# Altium PCB 175-00008 rev 1, PCB, M2 Focus Drive.PcbDoc (part 1 of 3)
Units mil, origin at the board's own origin, x right, y up, seen from the top; angles counter-clockwise.
Board outline 6885.96 x 6885.86 mil, 9 copper layers (Top Layer (*.GTL), Mid-Layer 1 (*.G1), +24V (*.GP1), GND (*.GP2), +5V (*.GP3), +12V (*.GP4), -12V (*.GP5), +3.3V (*.GP6), Bottom Layer (*.GBL)), stack 52.6 mil thick; 151 components, 161 nets, 896 pads, 368 vias.
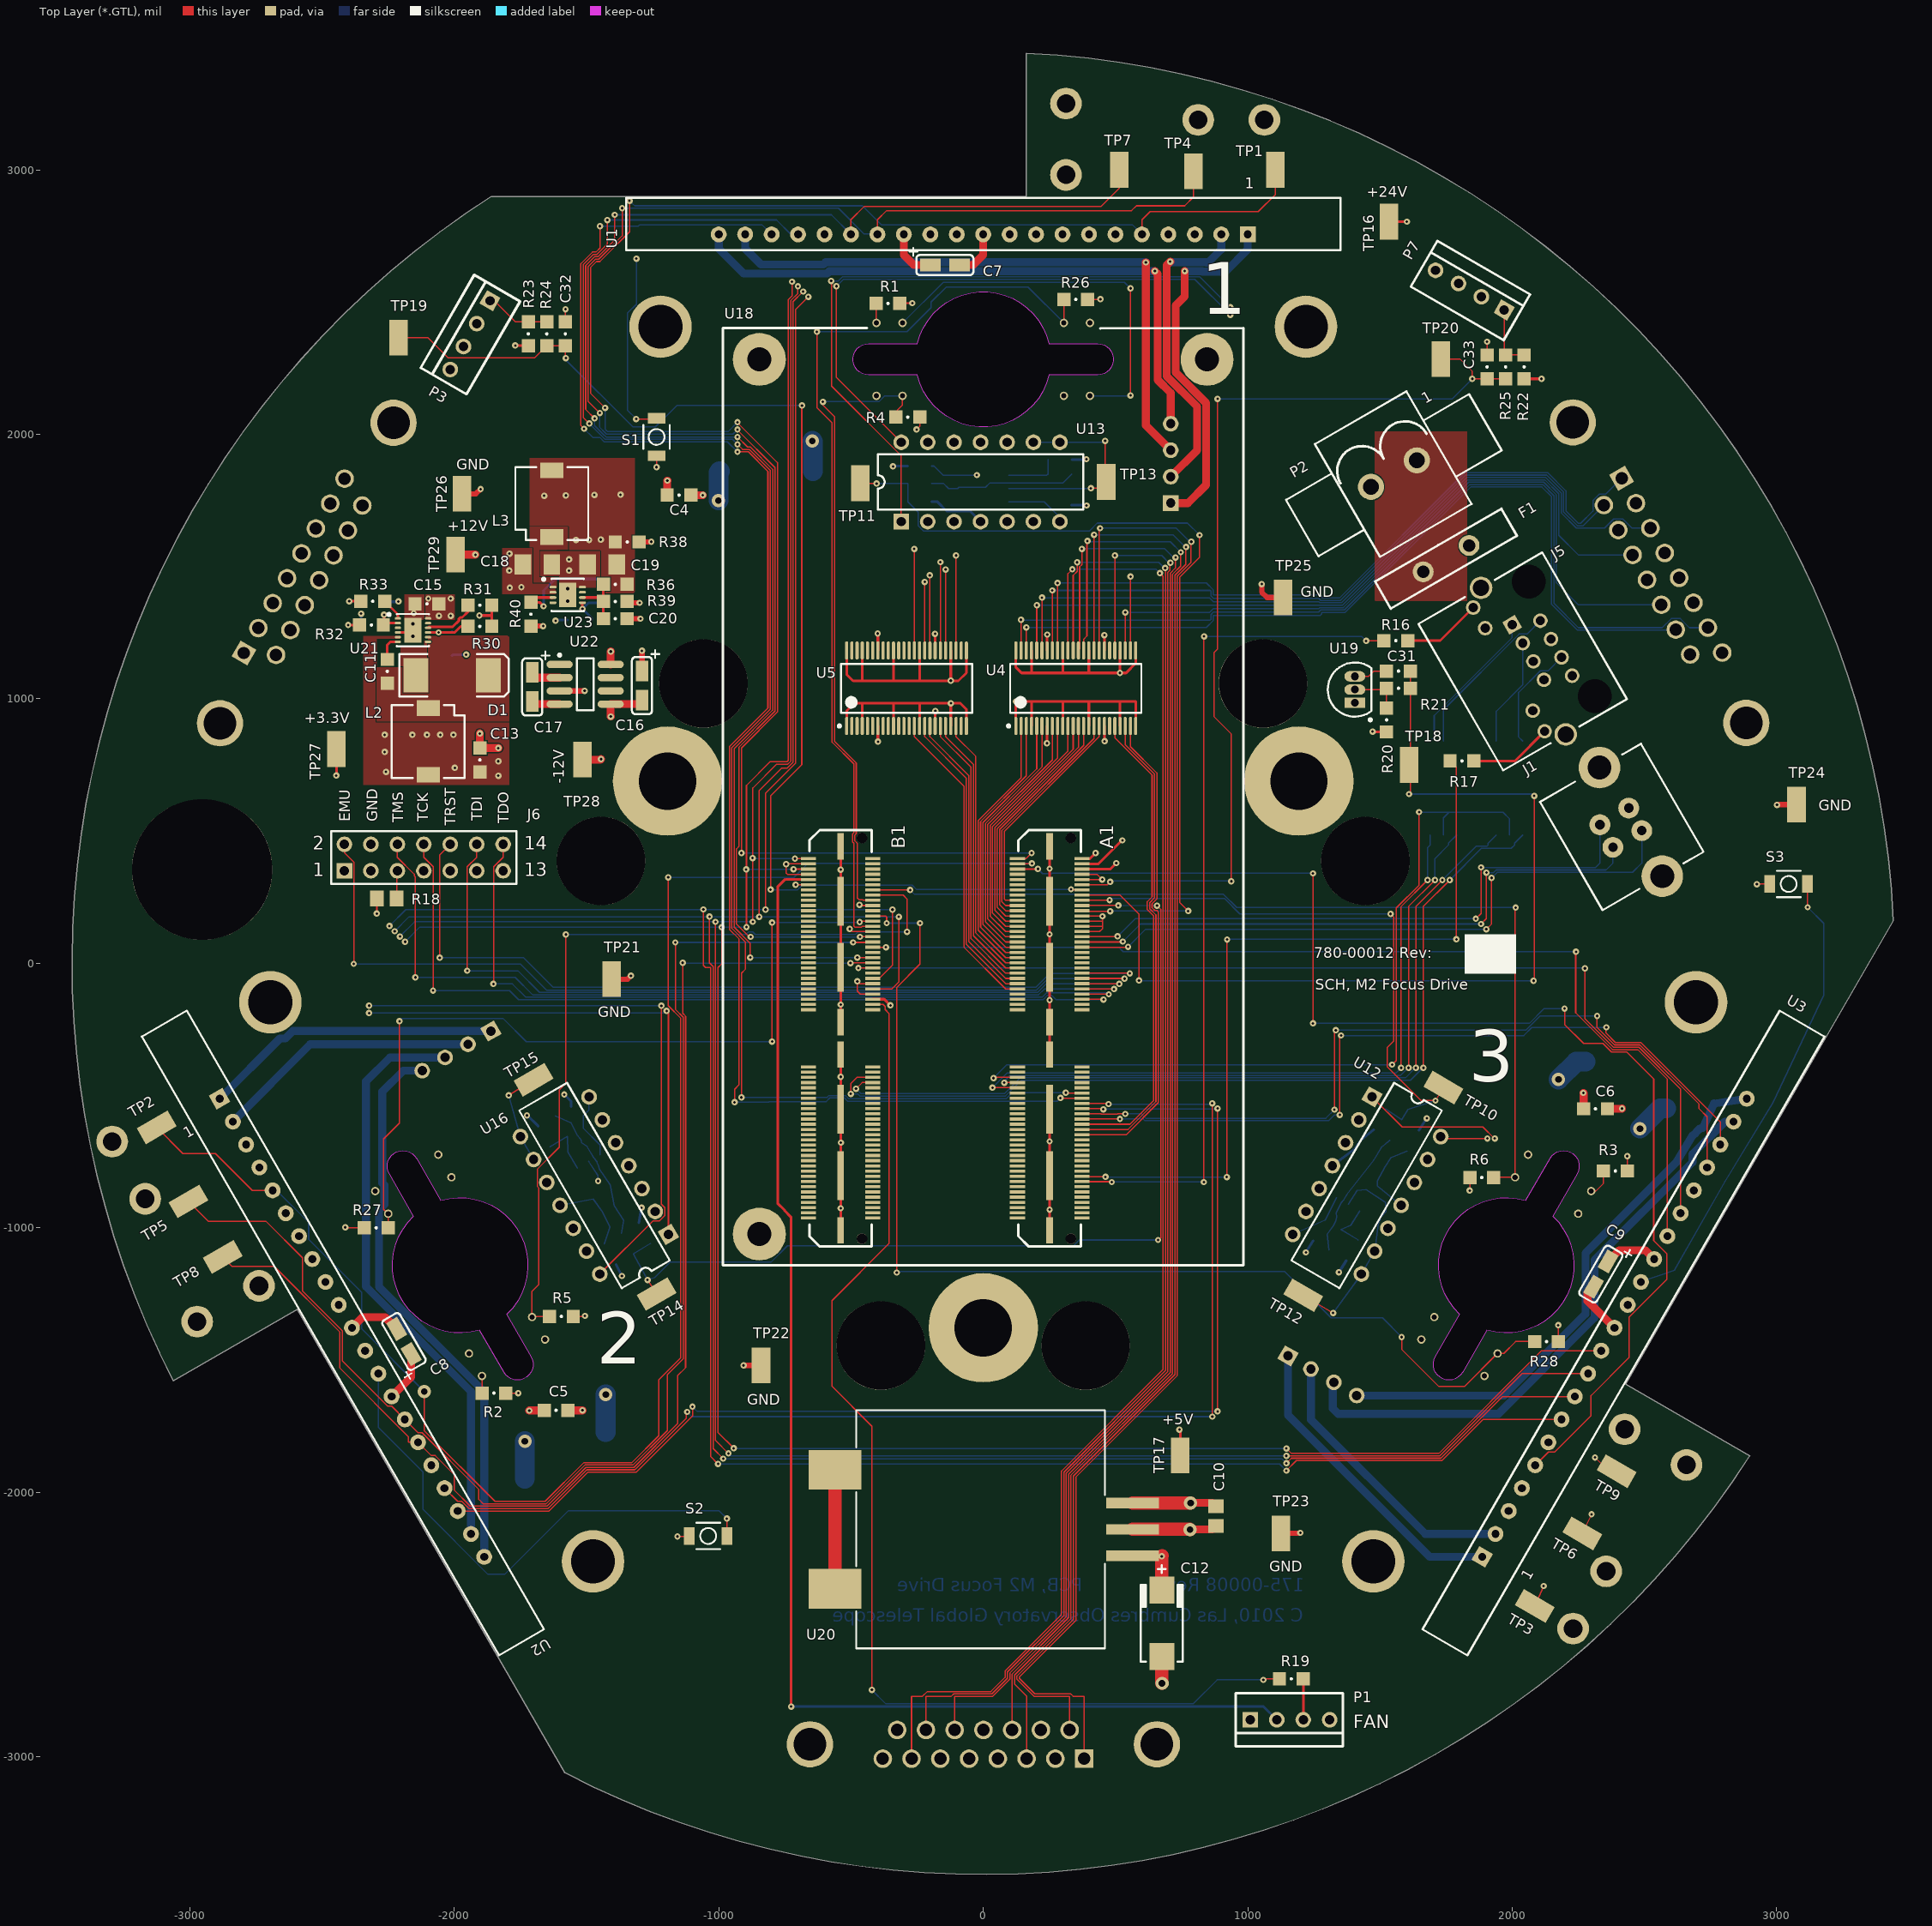
[diagram p0: Top Layer (*.GTL) view]
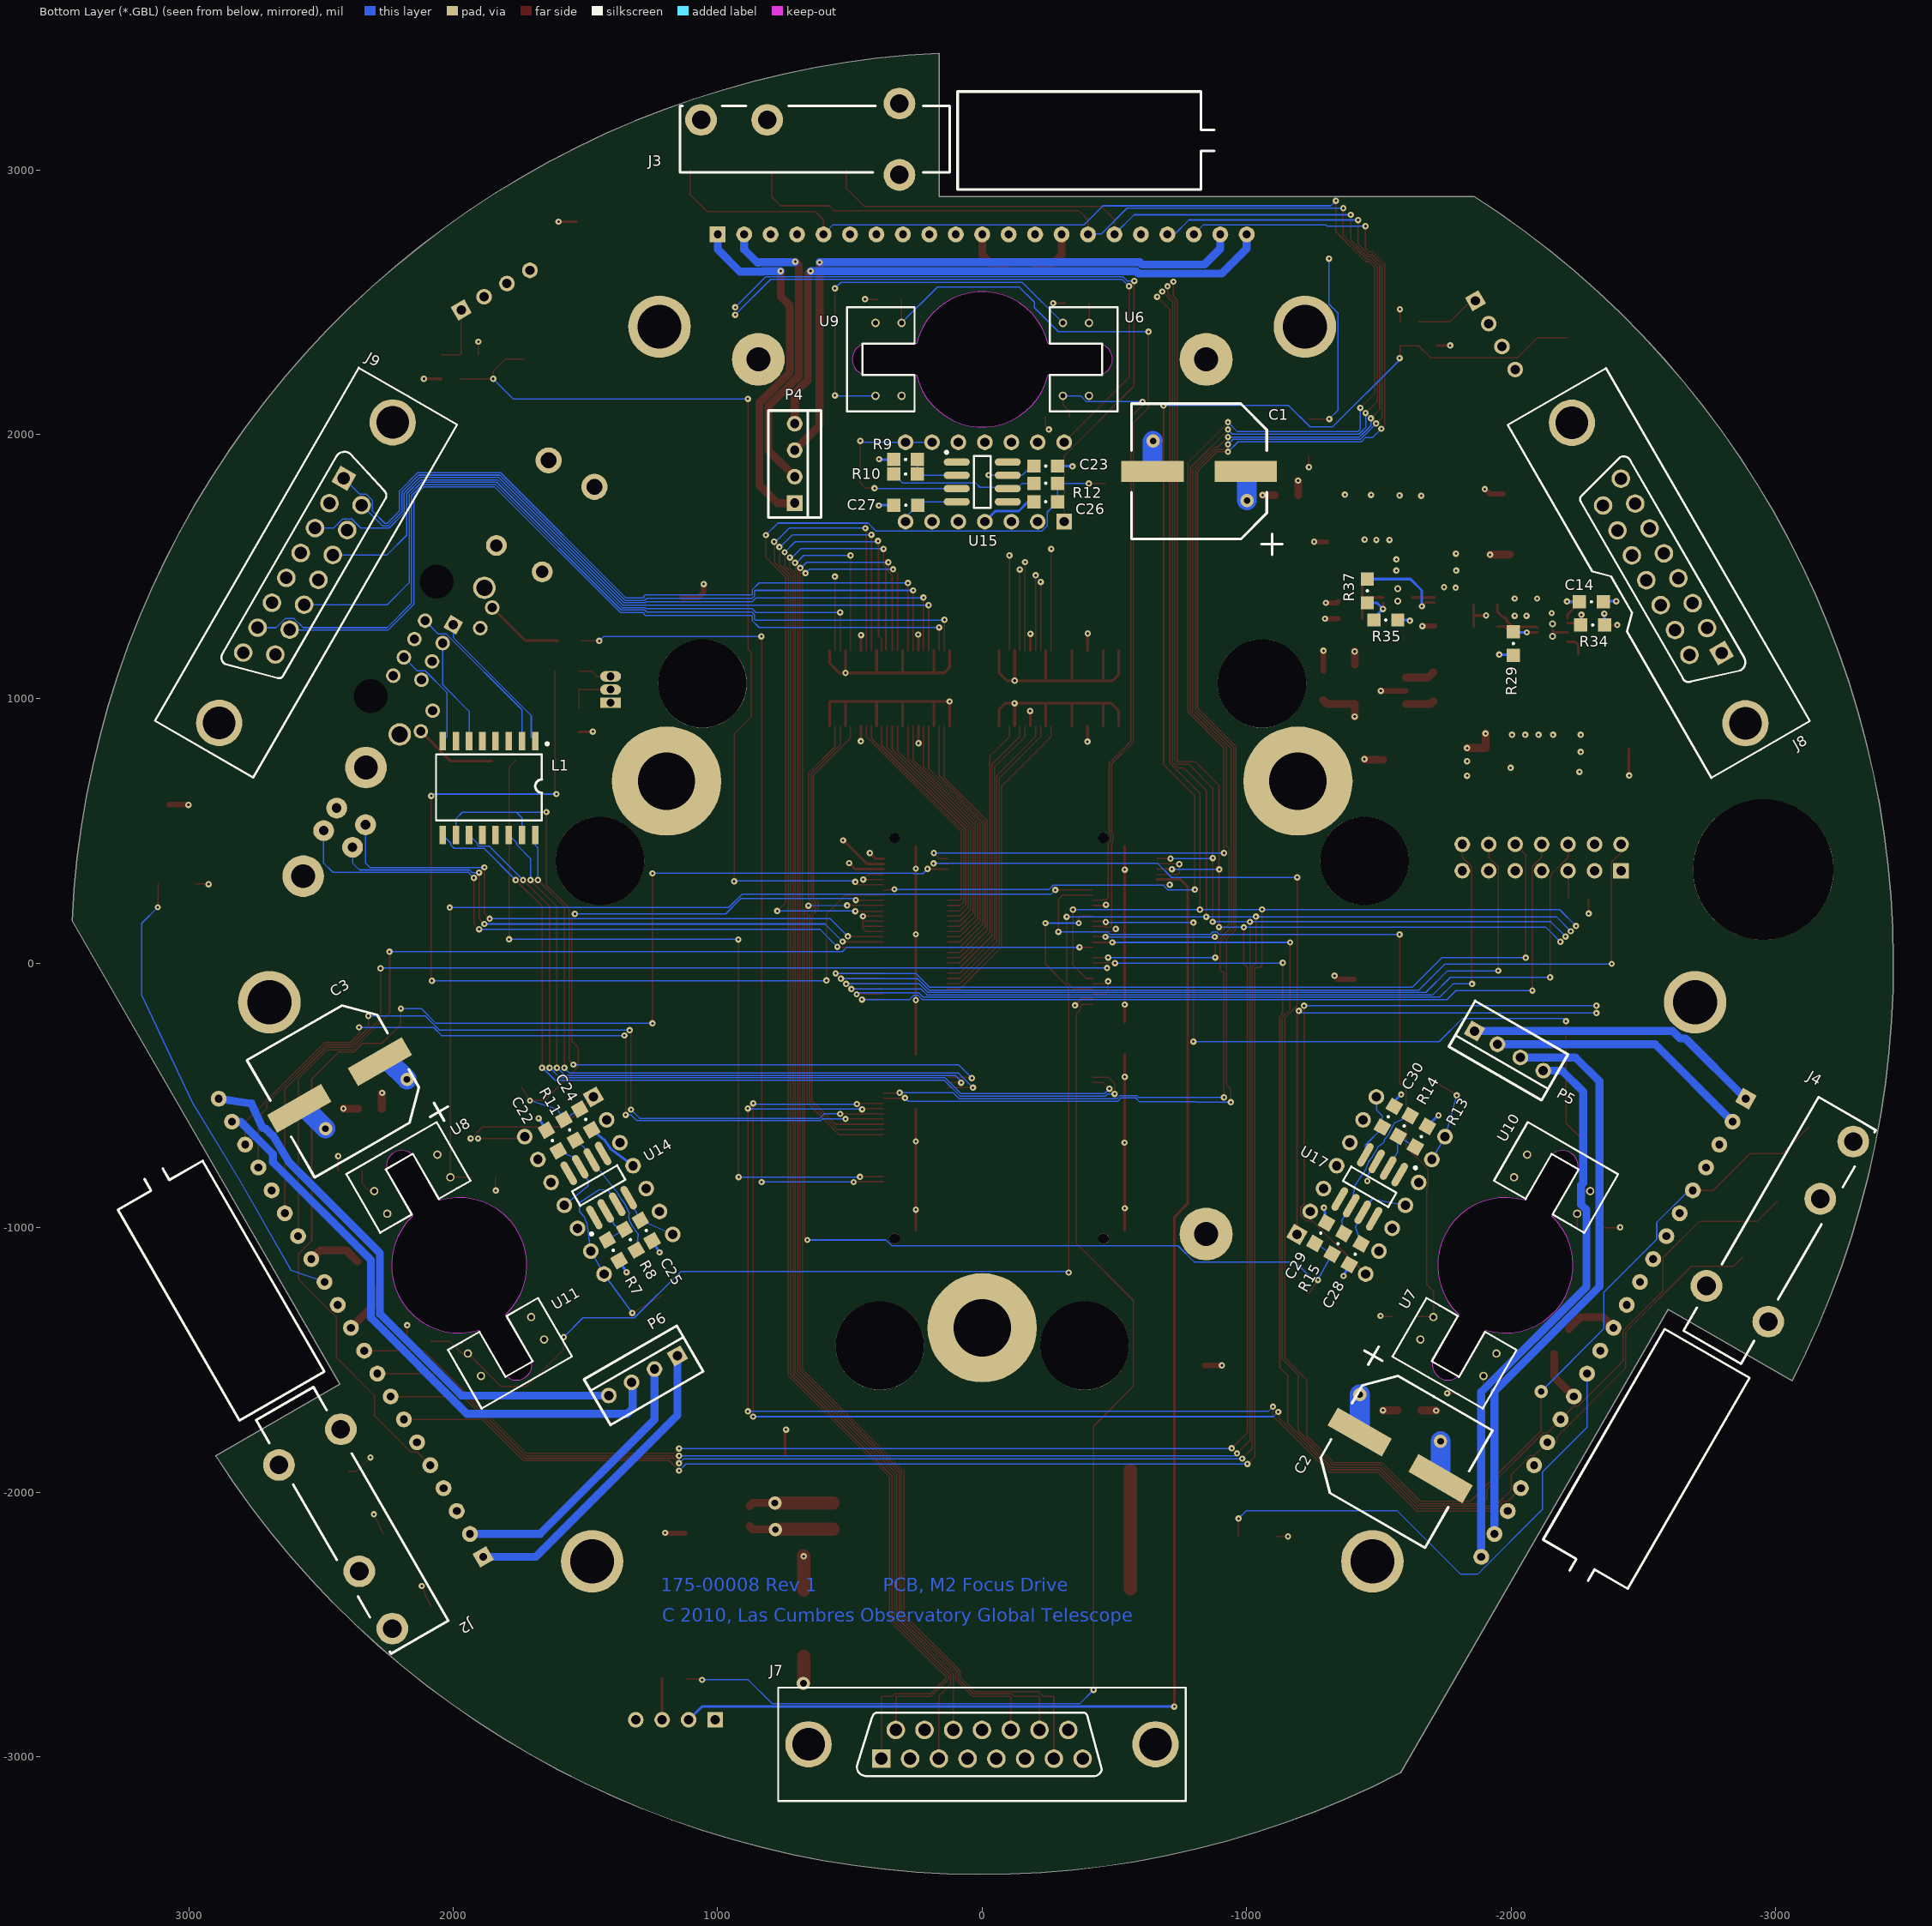
[diagram p1: Bottom Layer (*.GBL) view, seen from below]
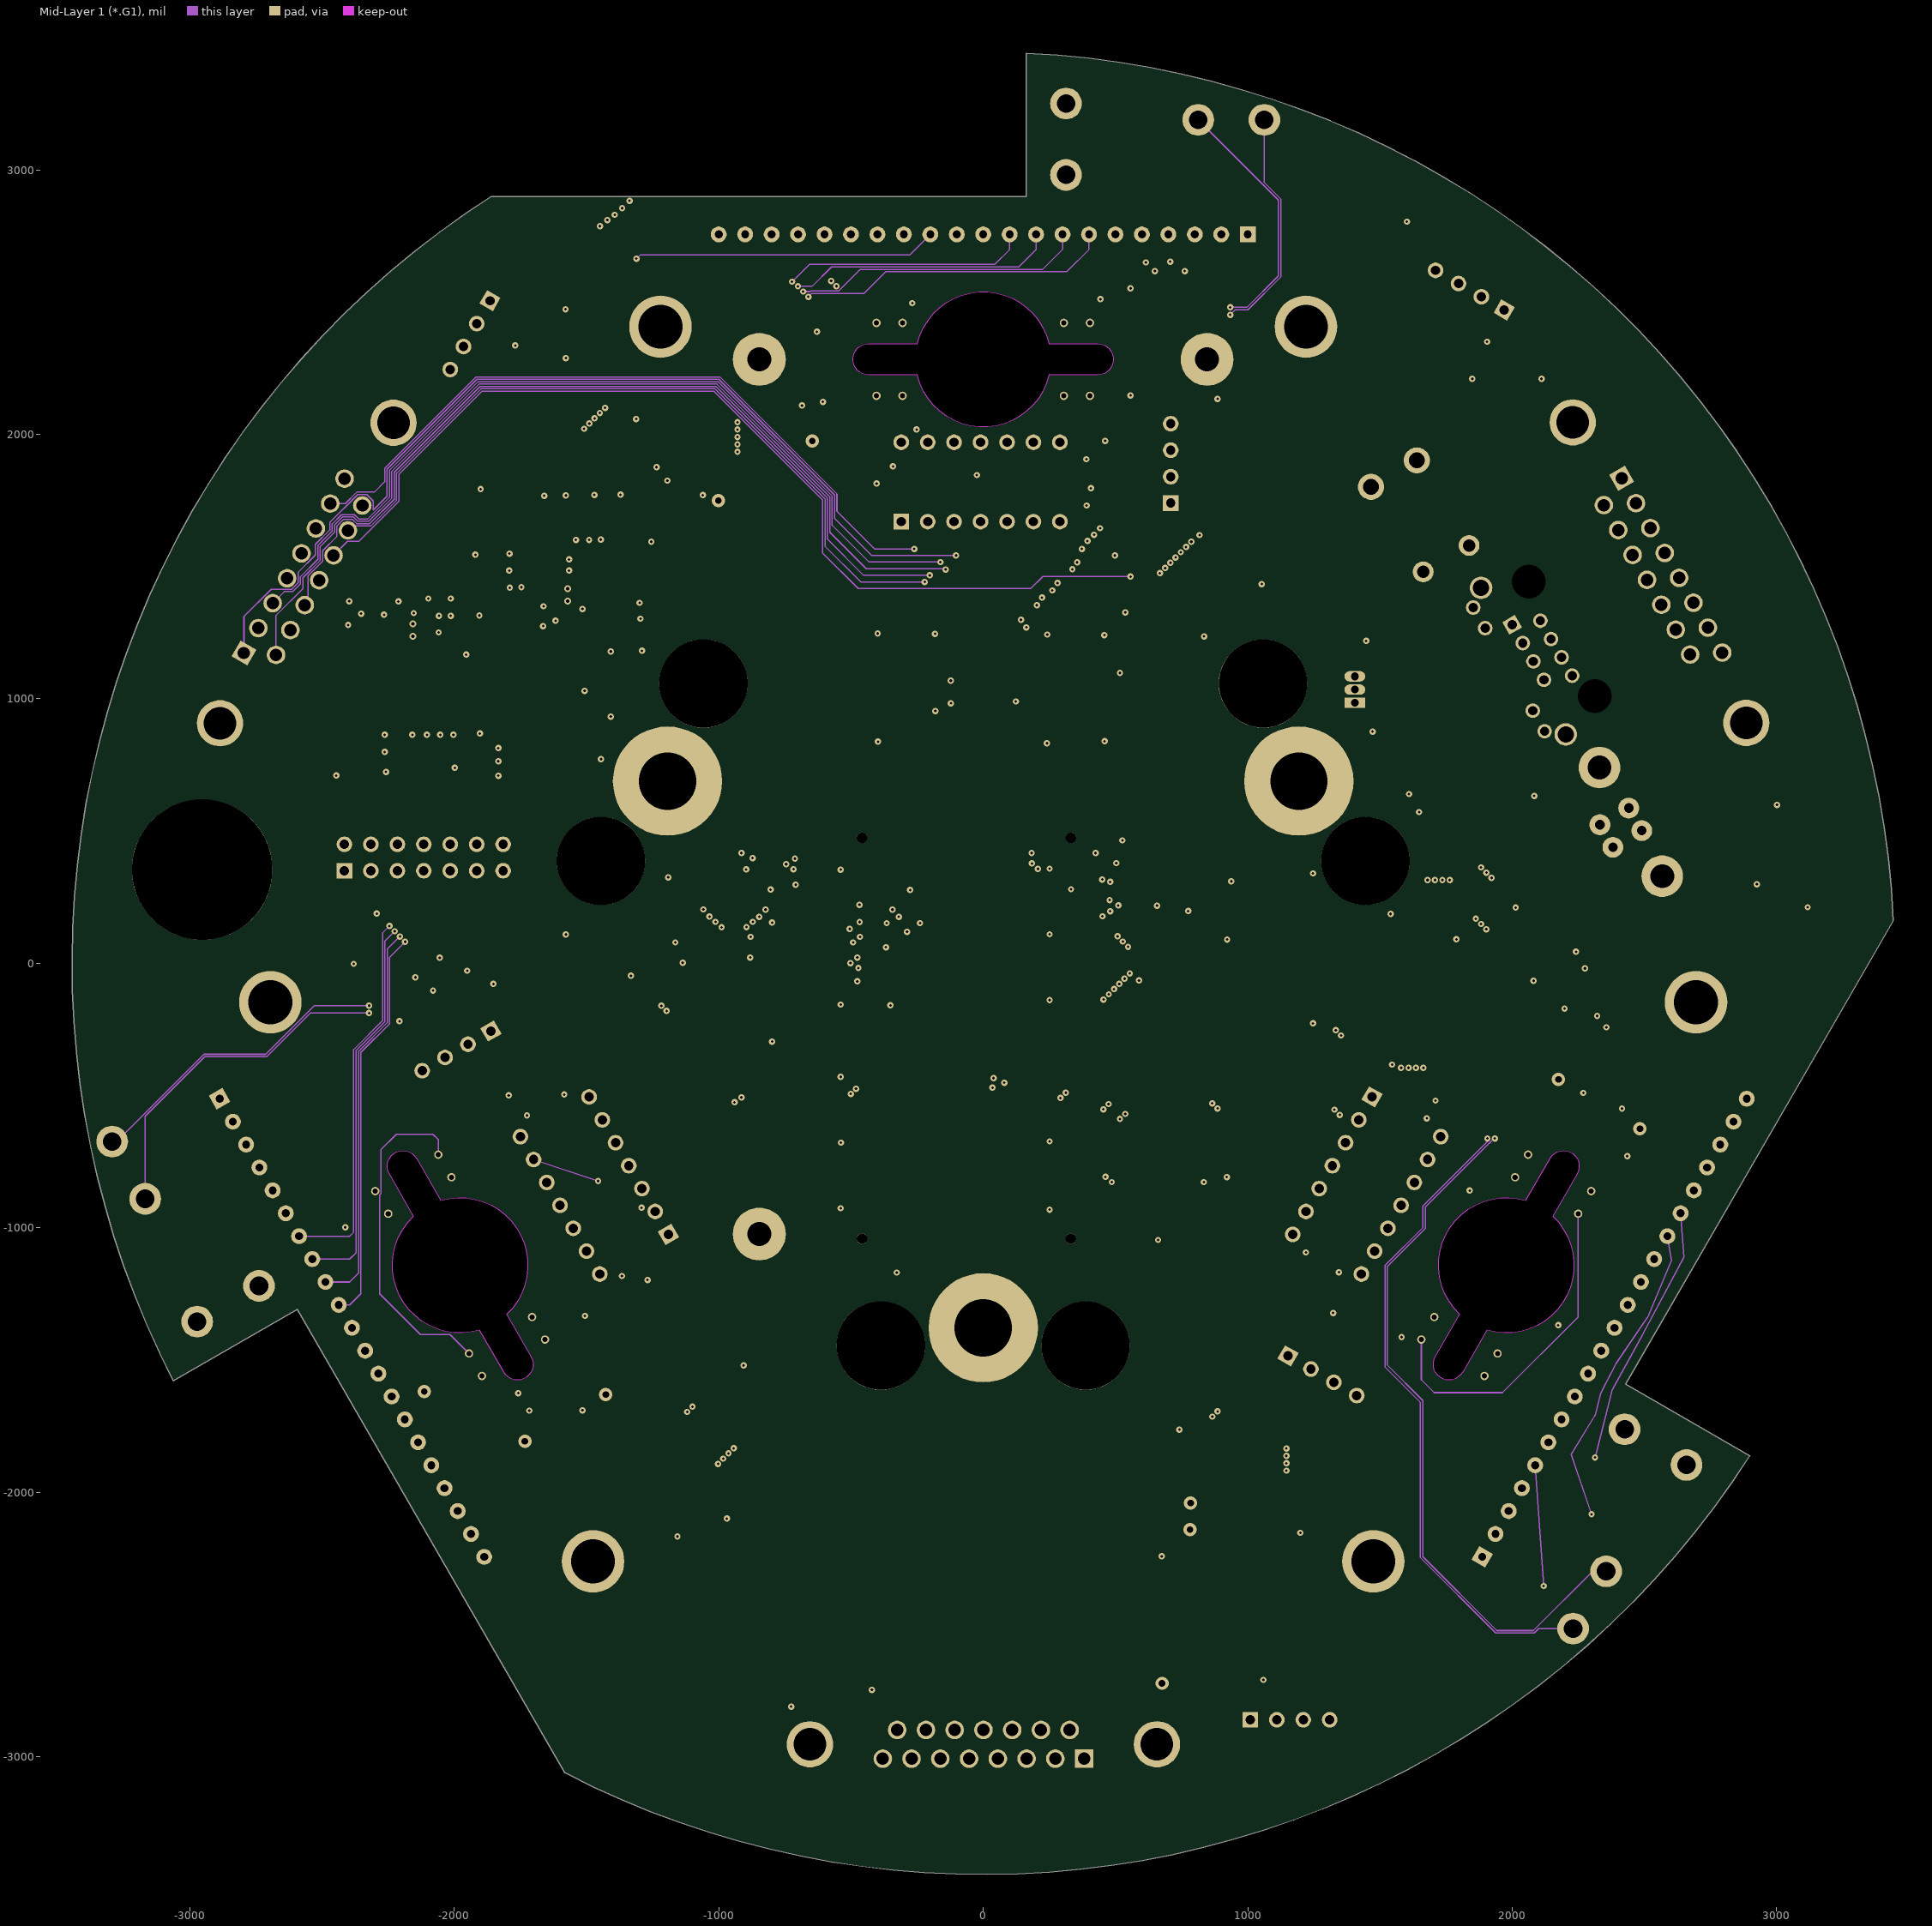
[diagram p2: Mid-Layer 1 (*.G1)]
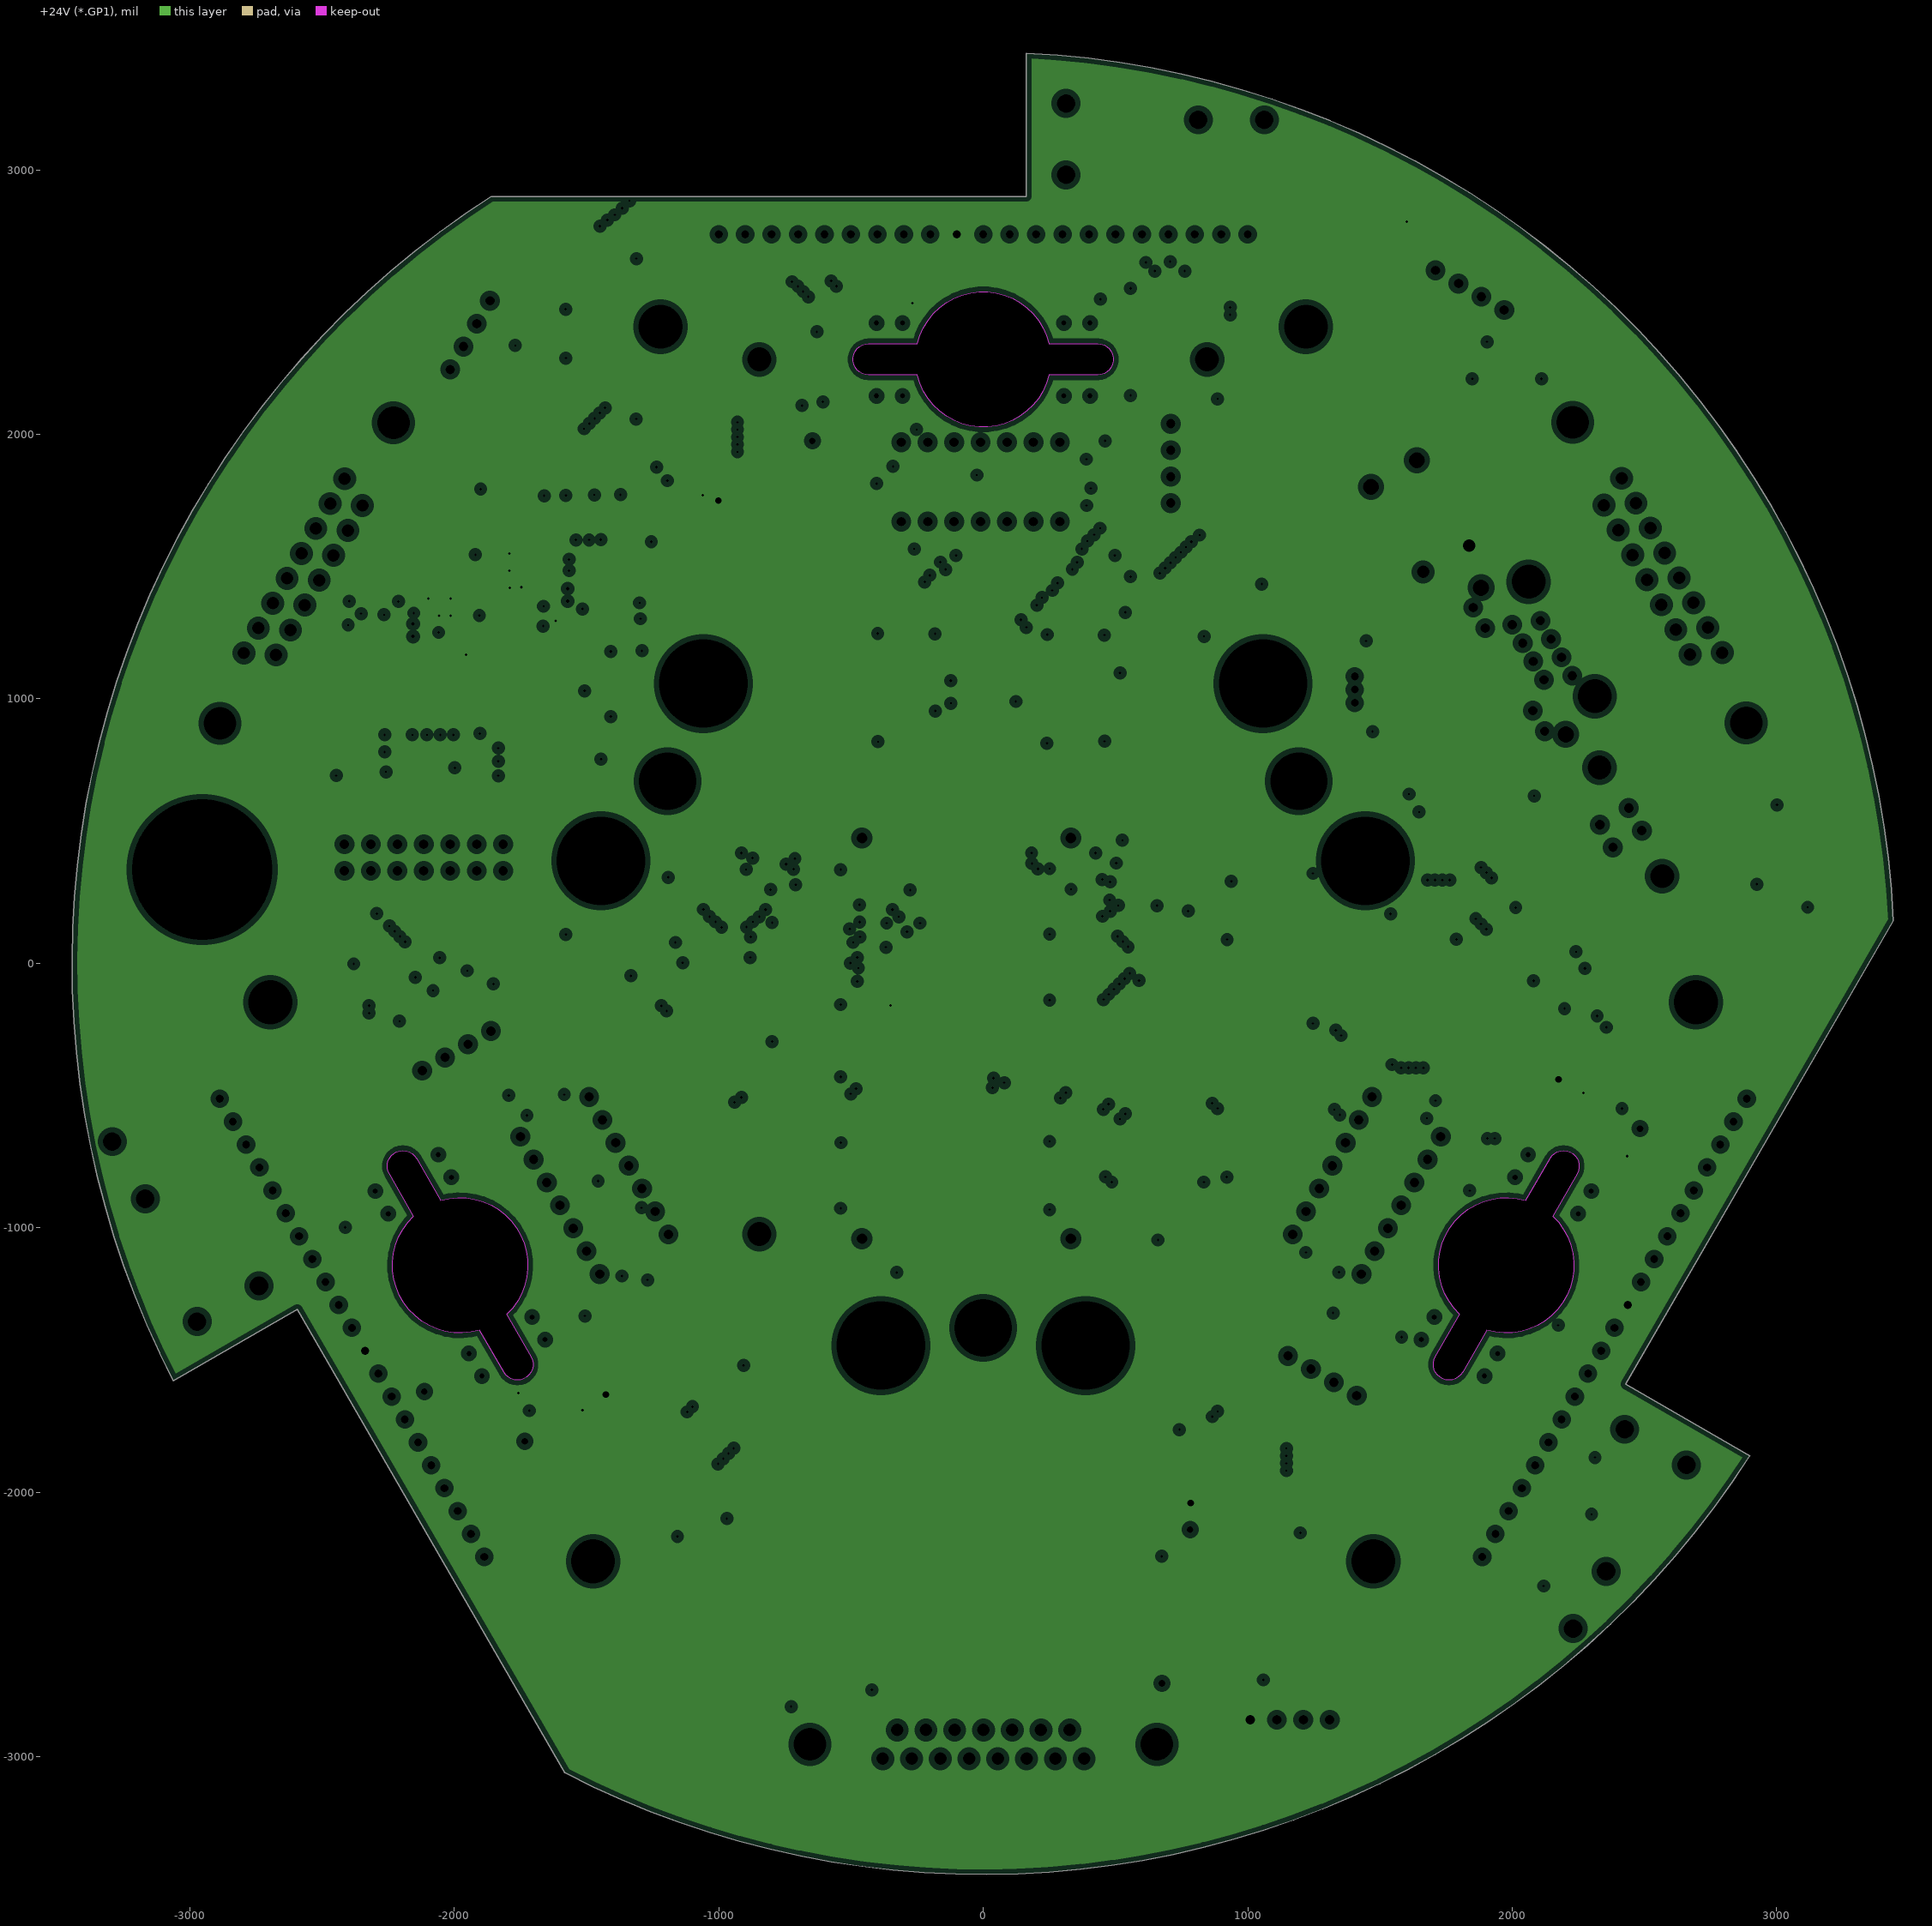
[diagram p3: +24V (*.GP1), clearances drawn from the general rule]
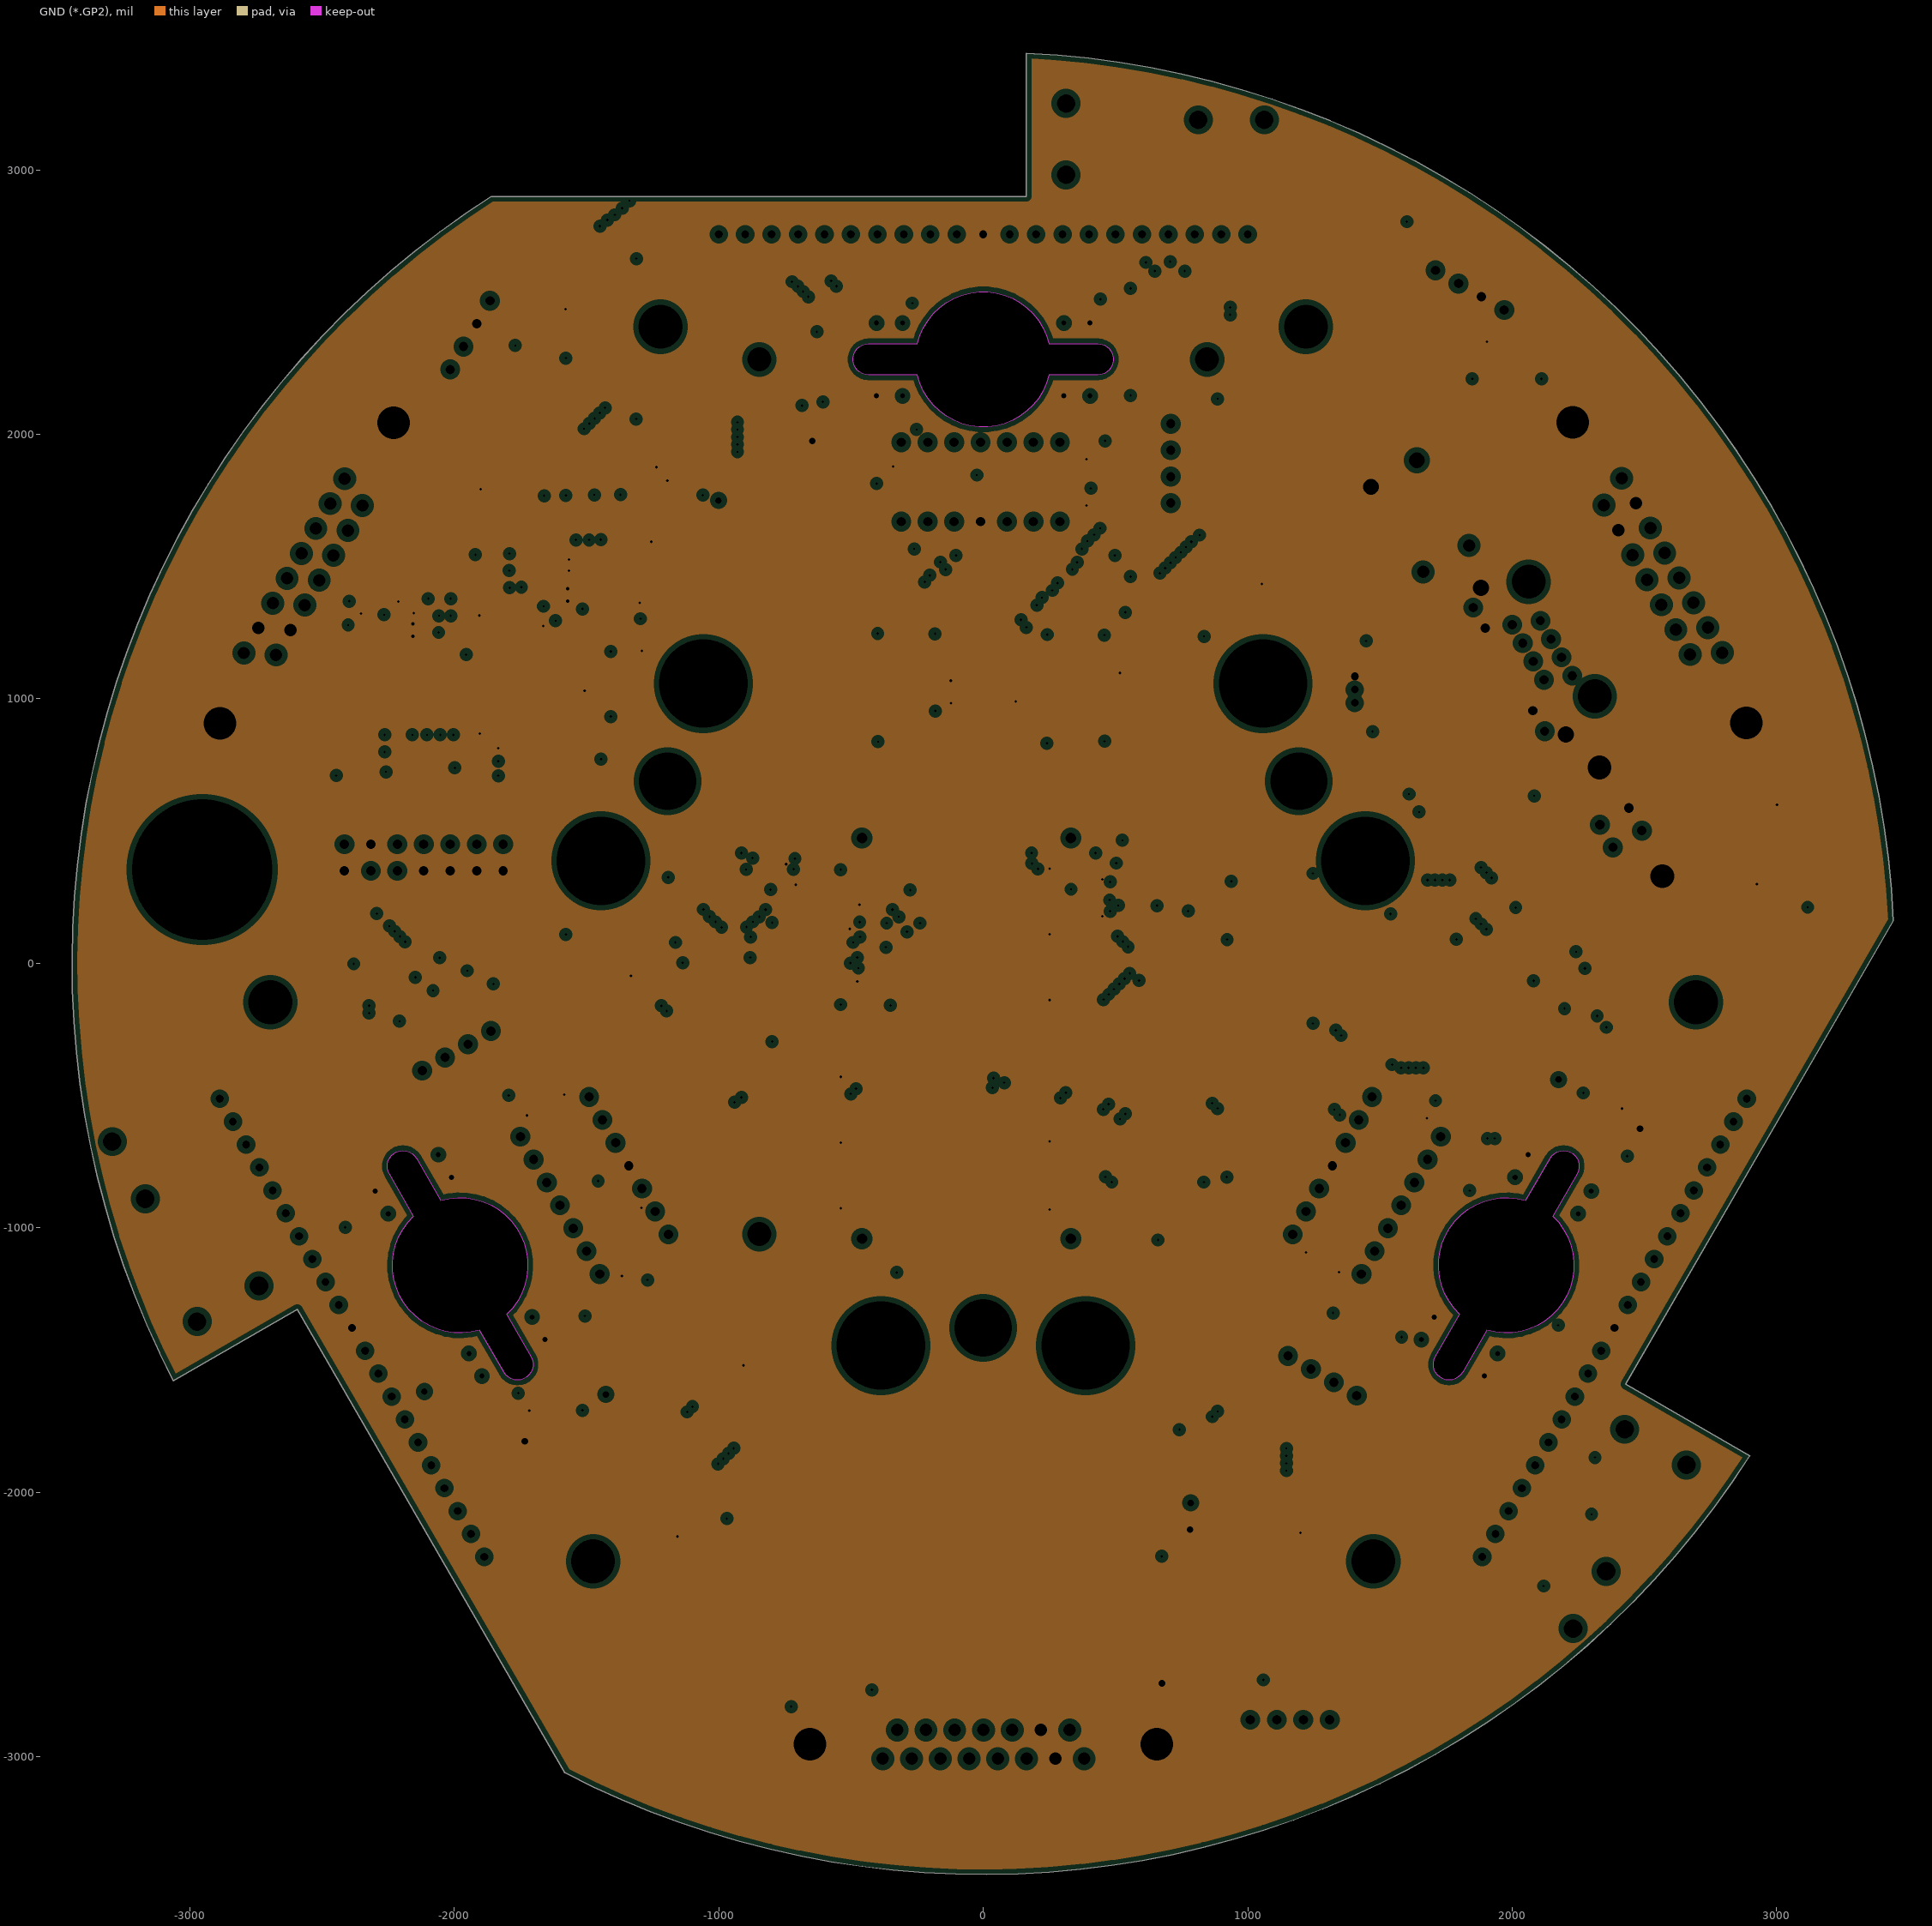
[diagram p4: GND (*.GP2), clearances drawn from the general rule]
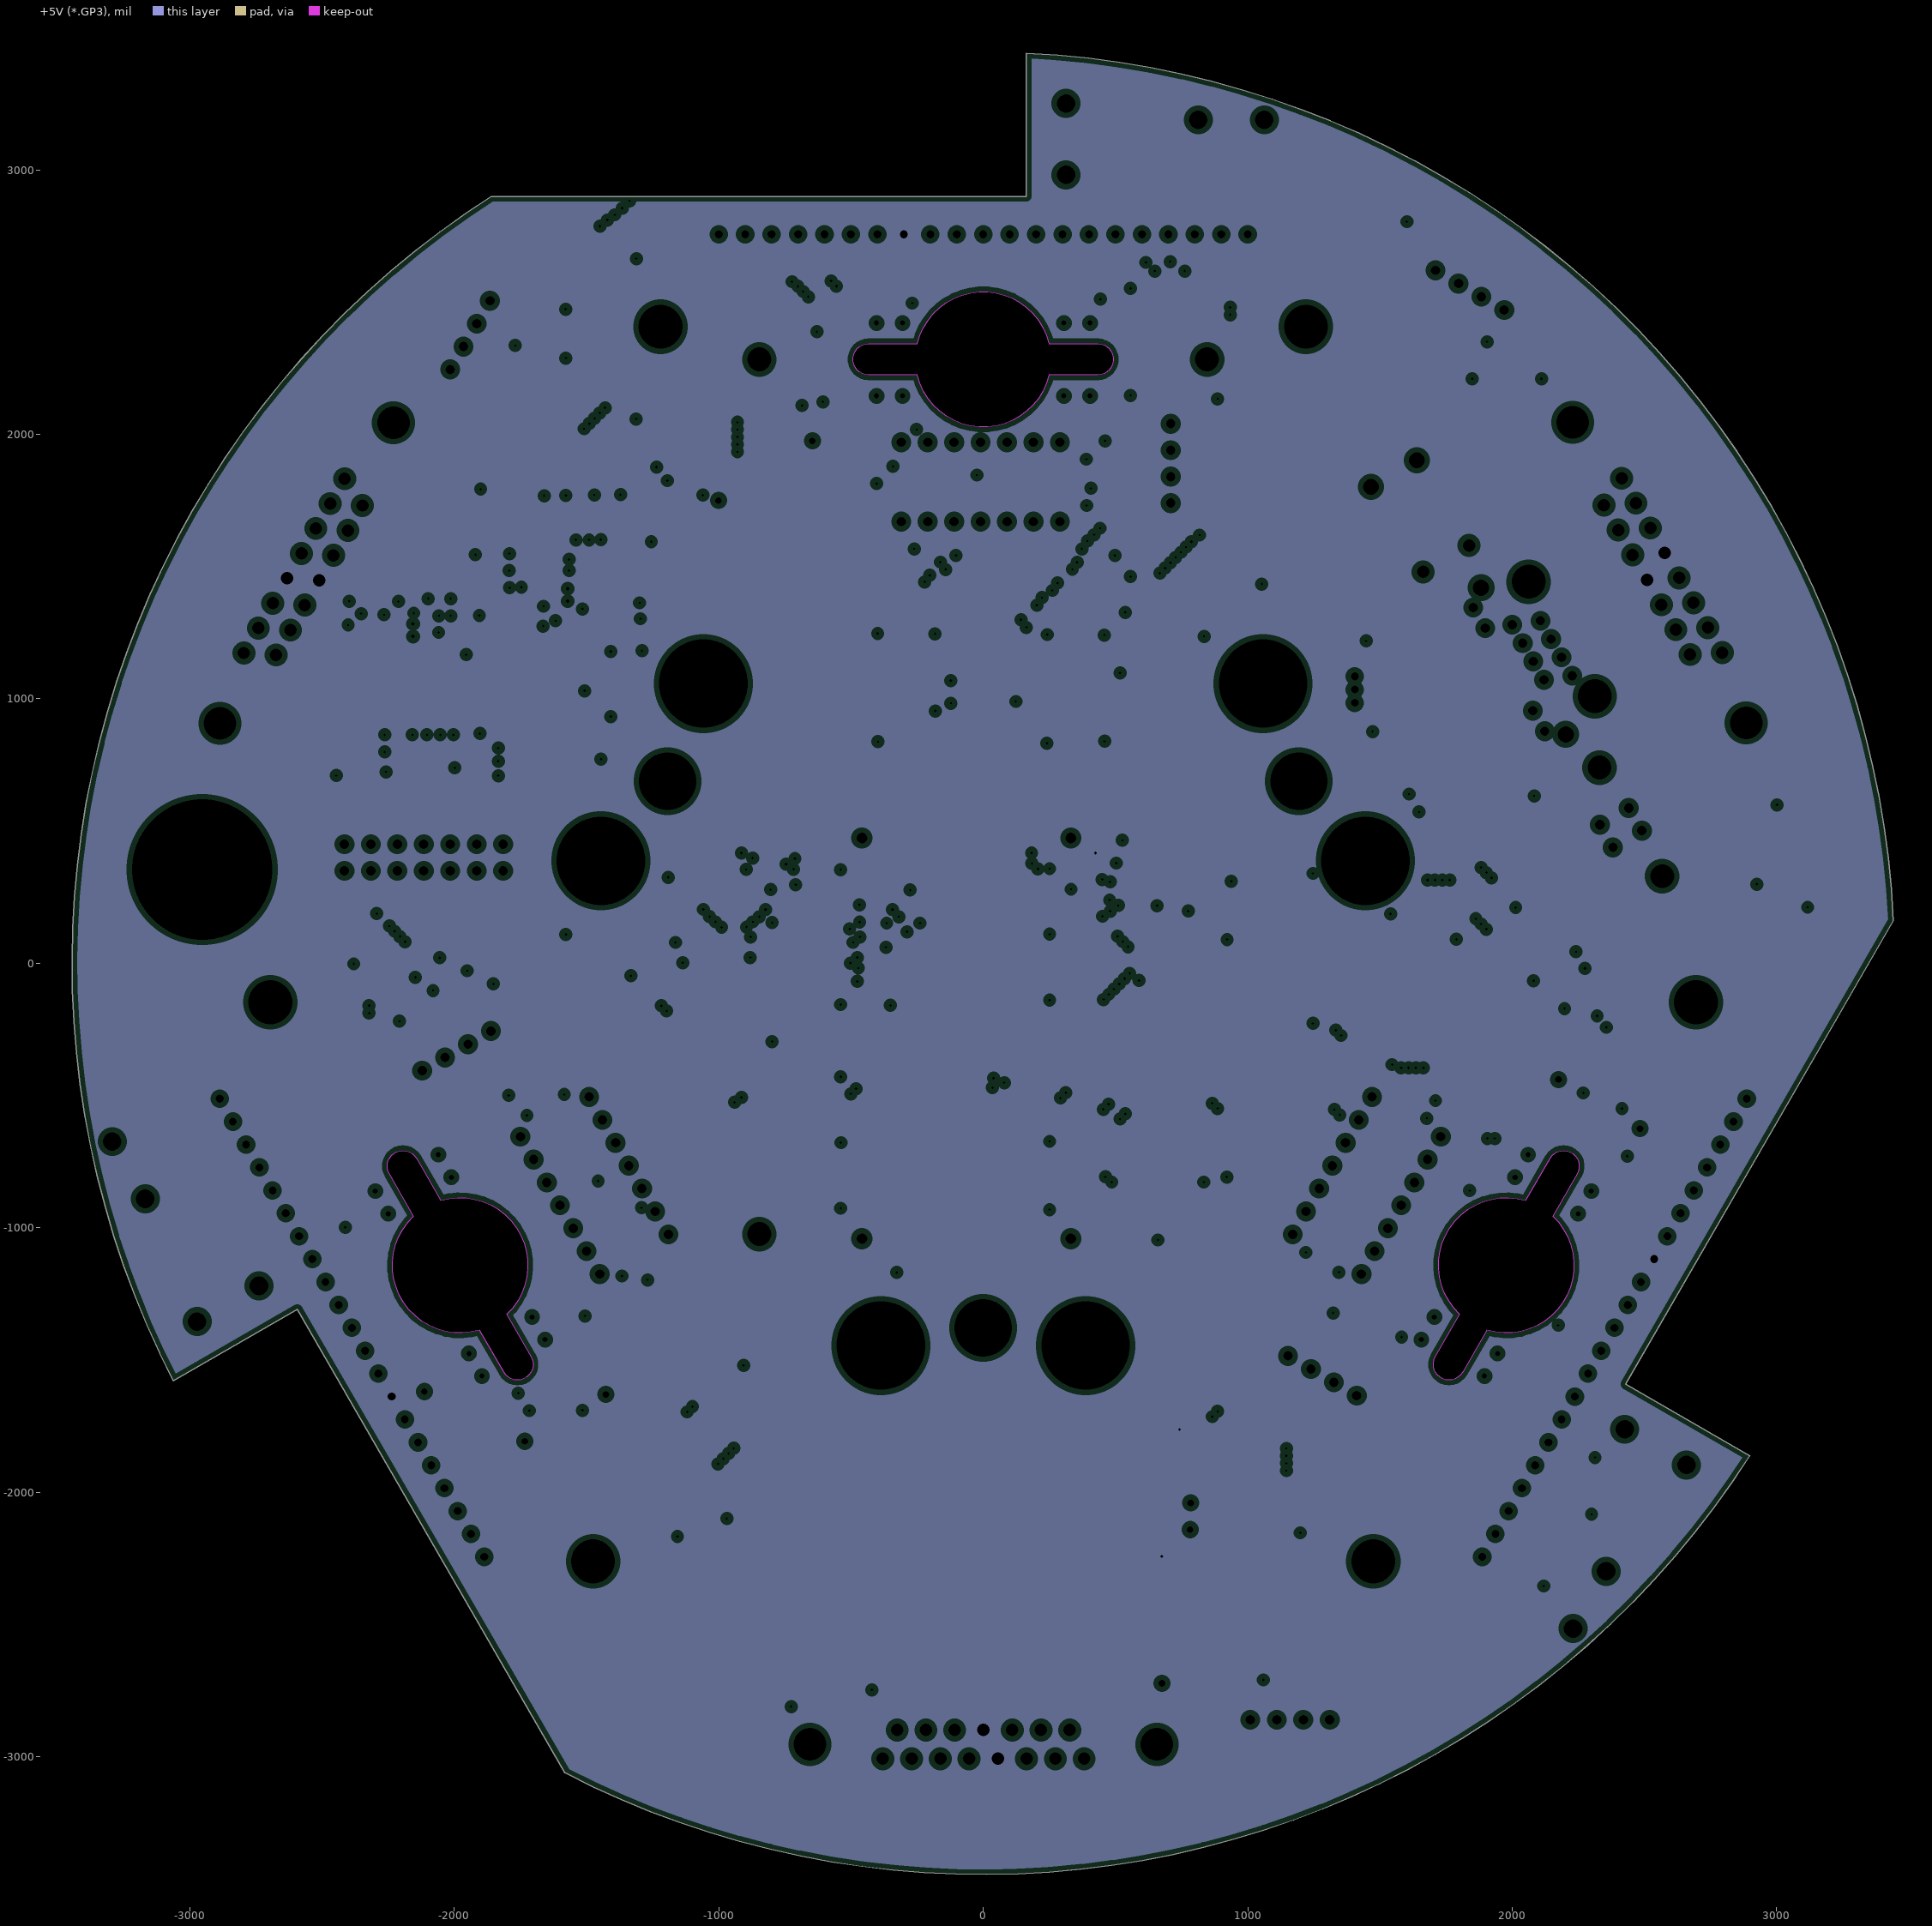
[diagram p5: +5V (*.GP3), clearances drawn from the general rule]
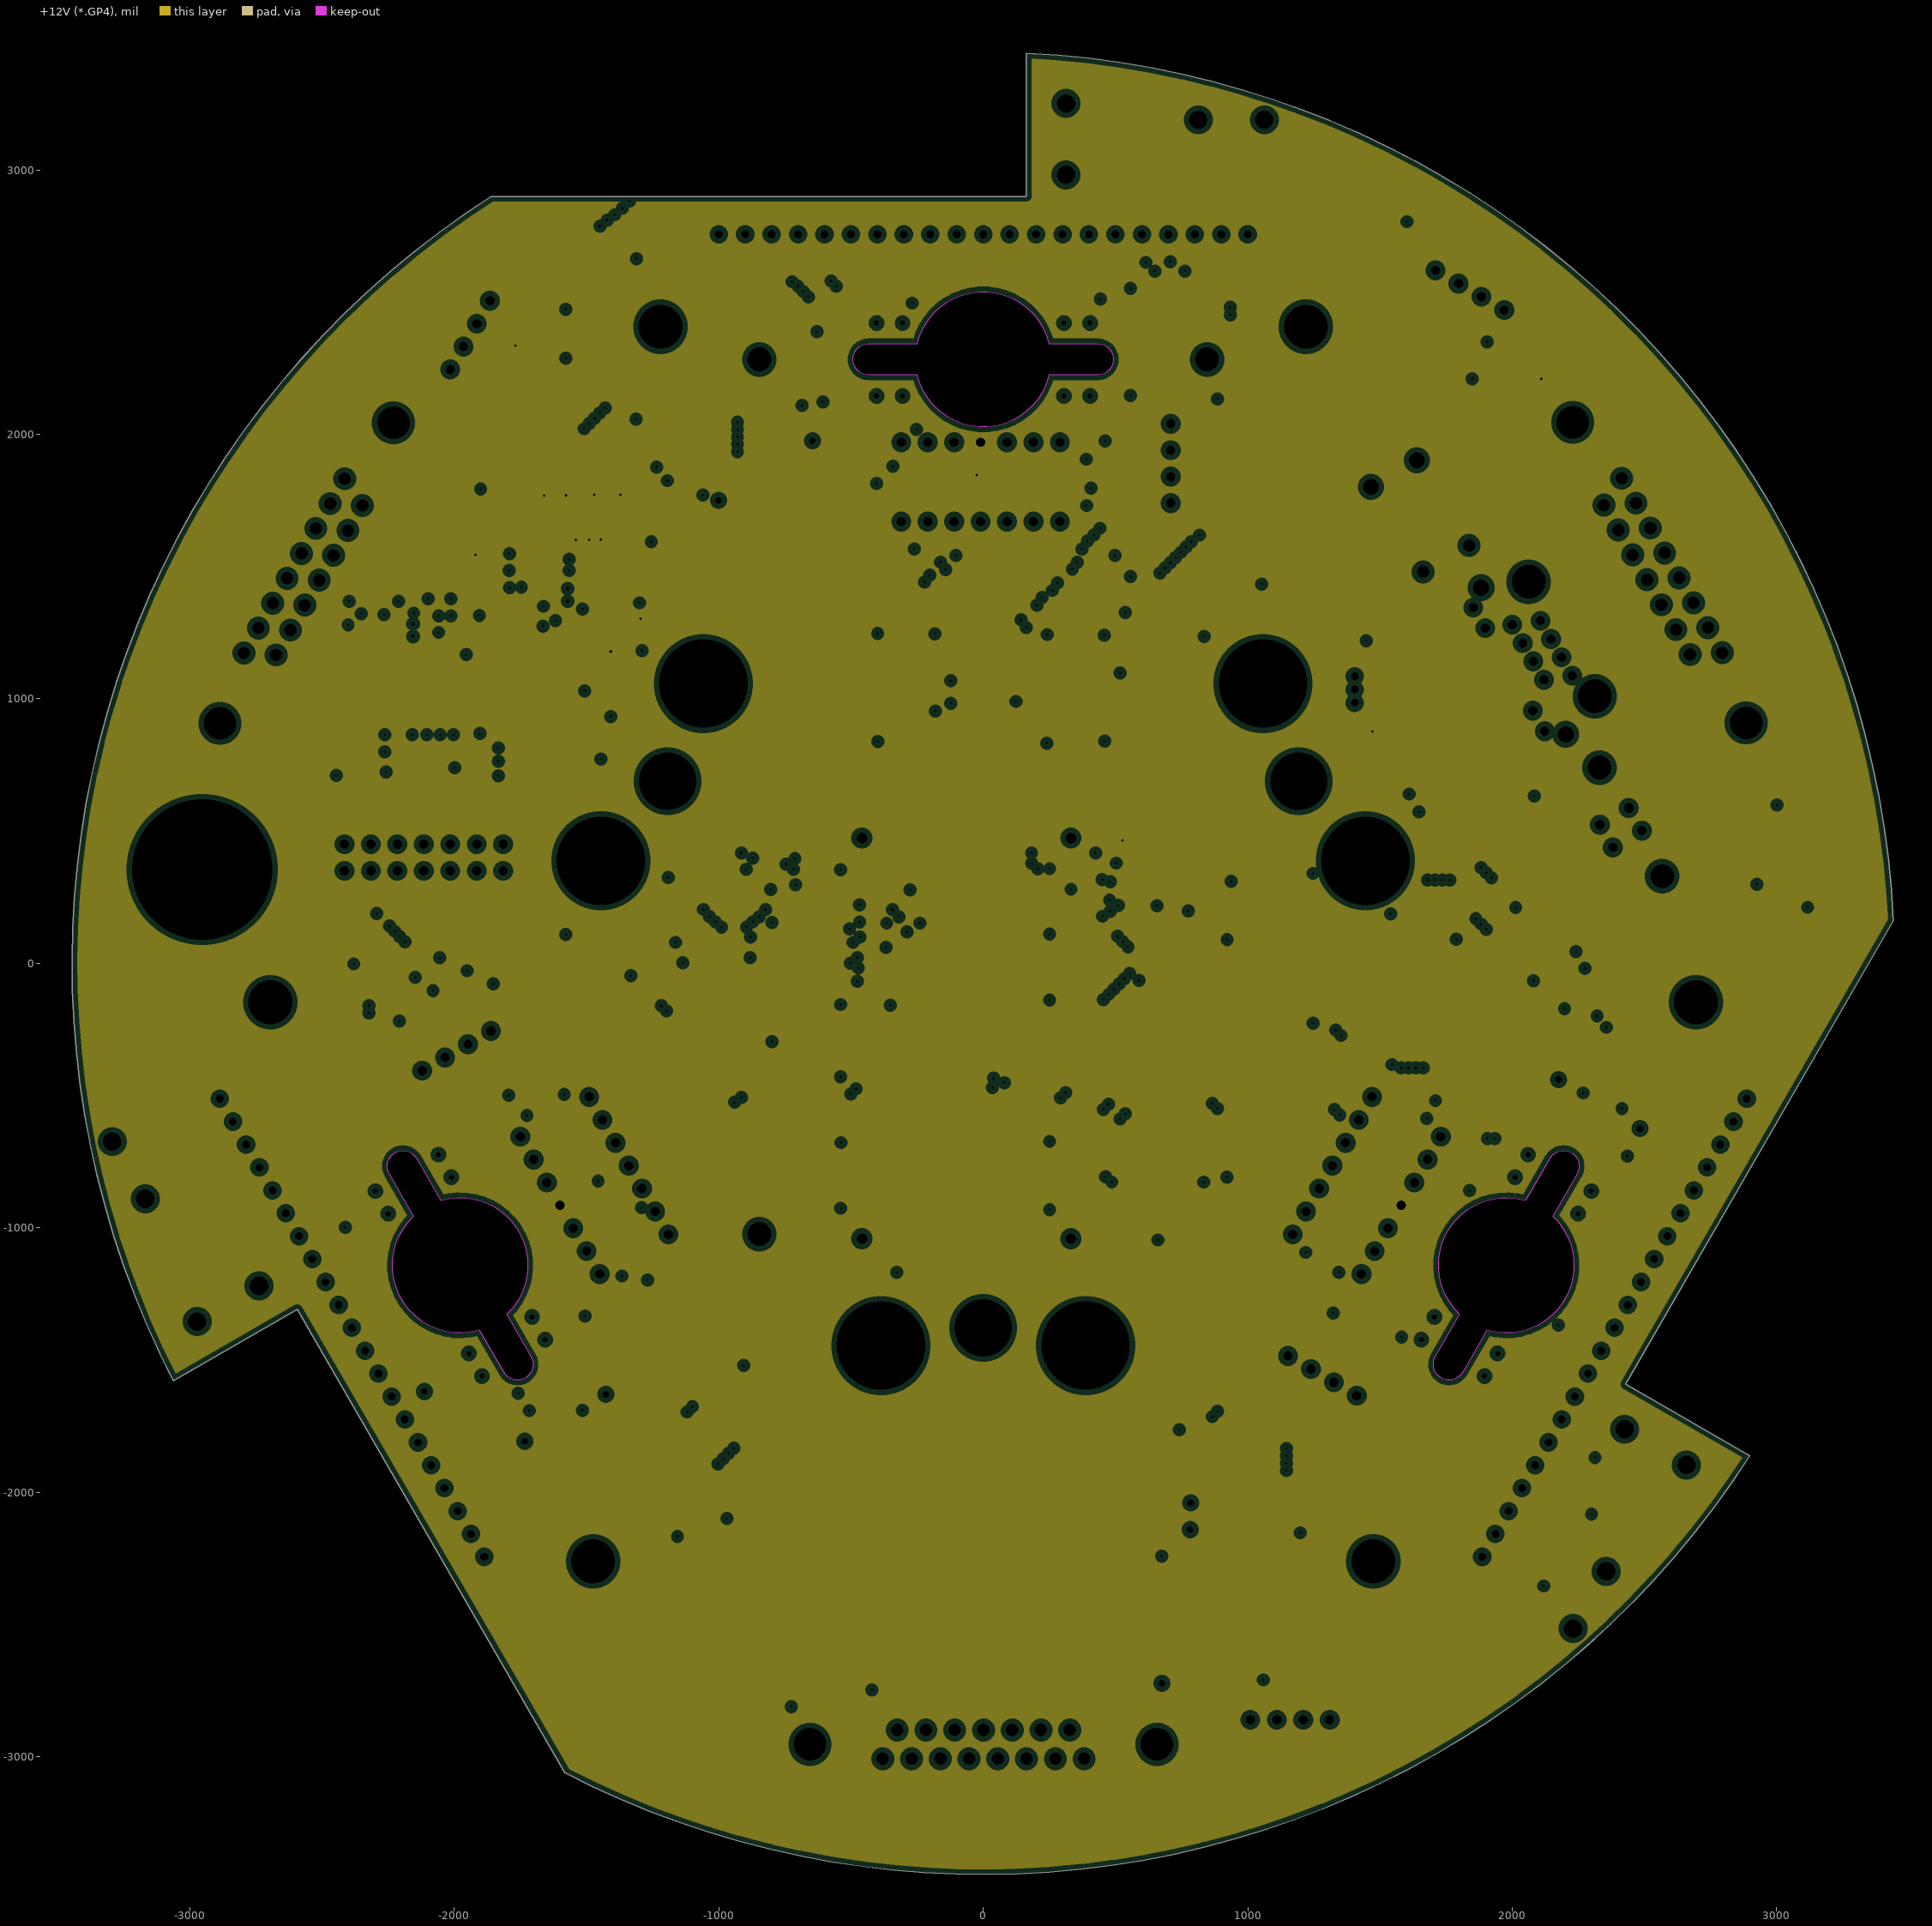
[diagram p6: +12V (*.GP4), clearances drawn from the general rule]
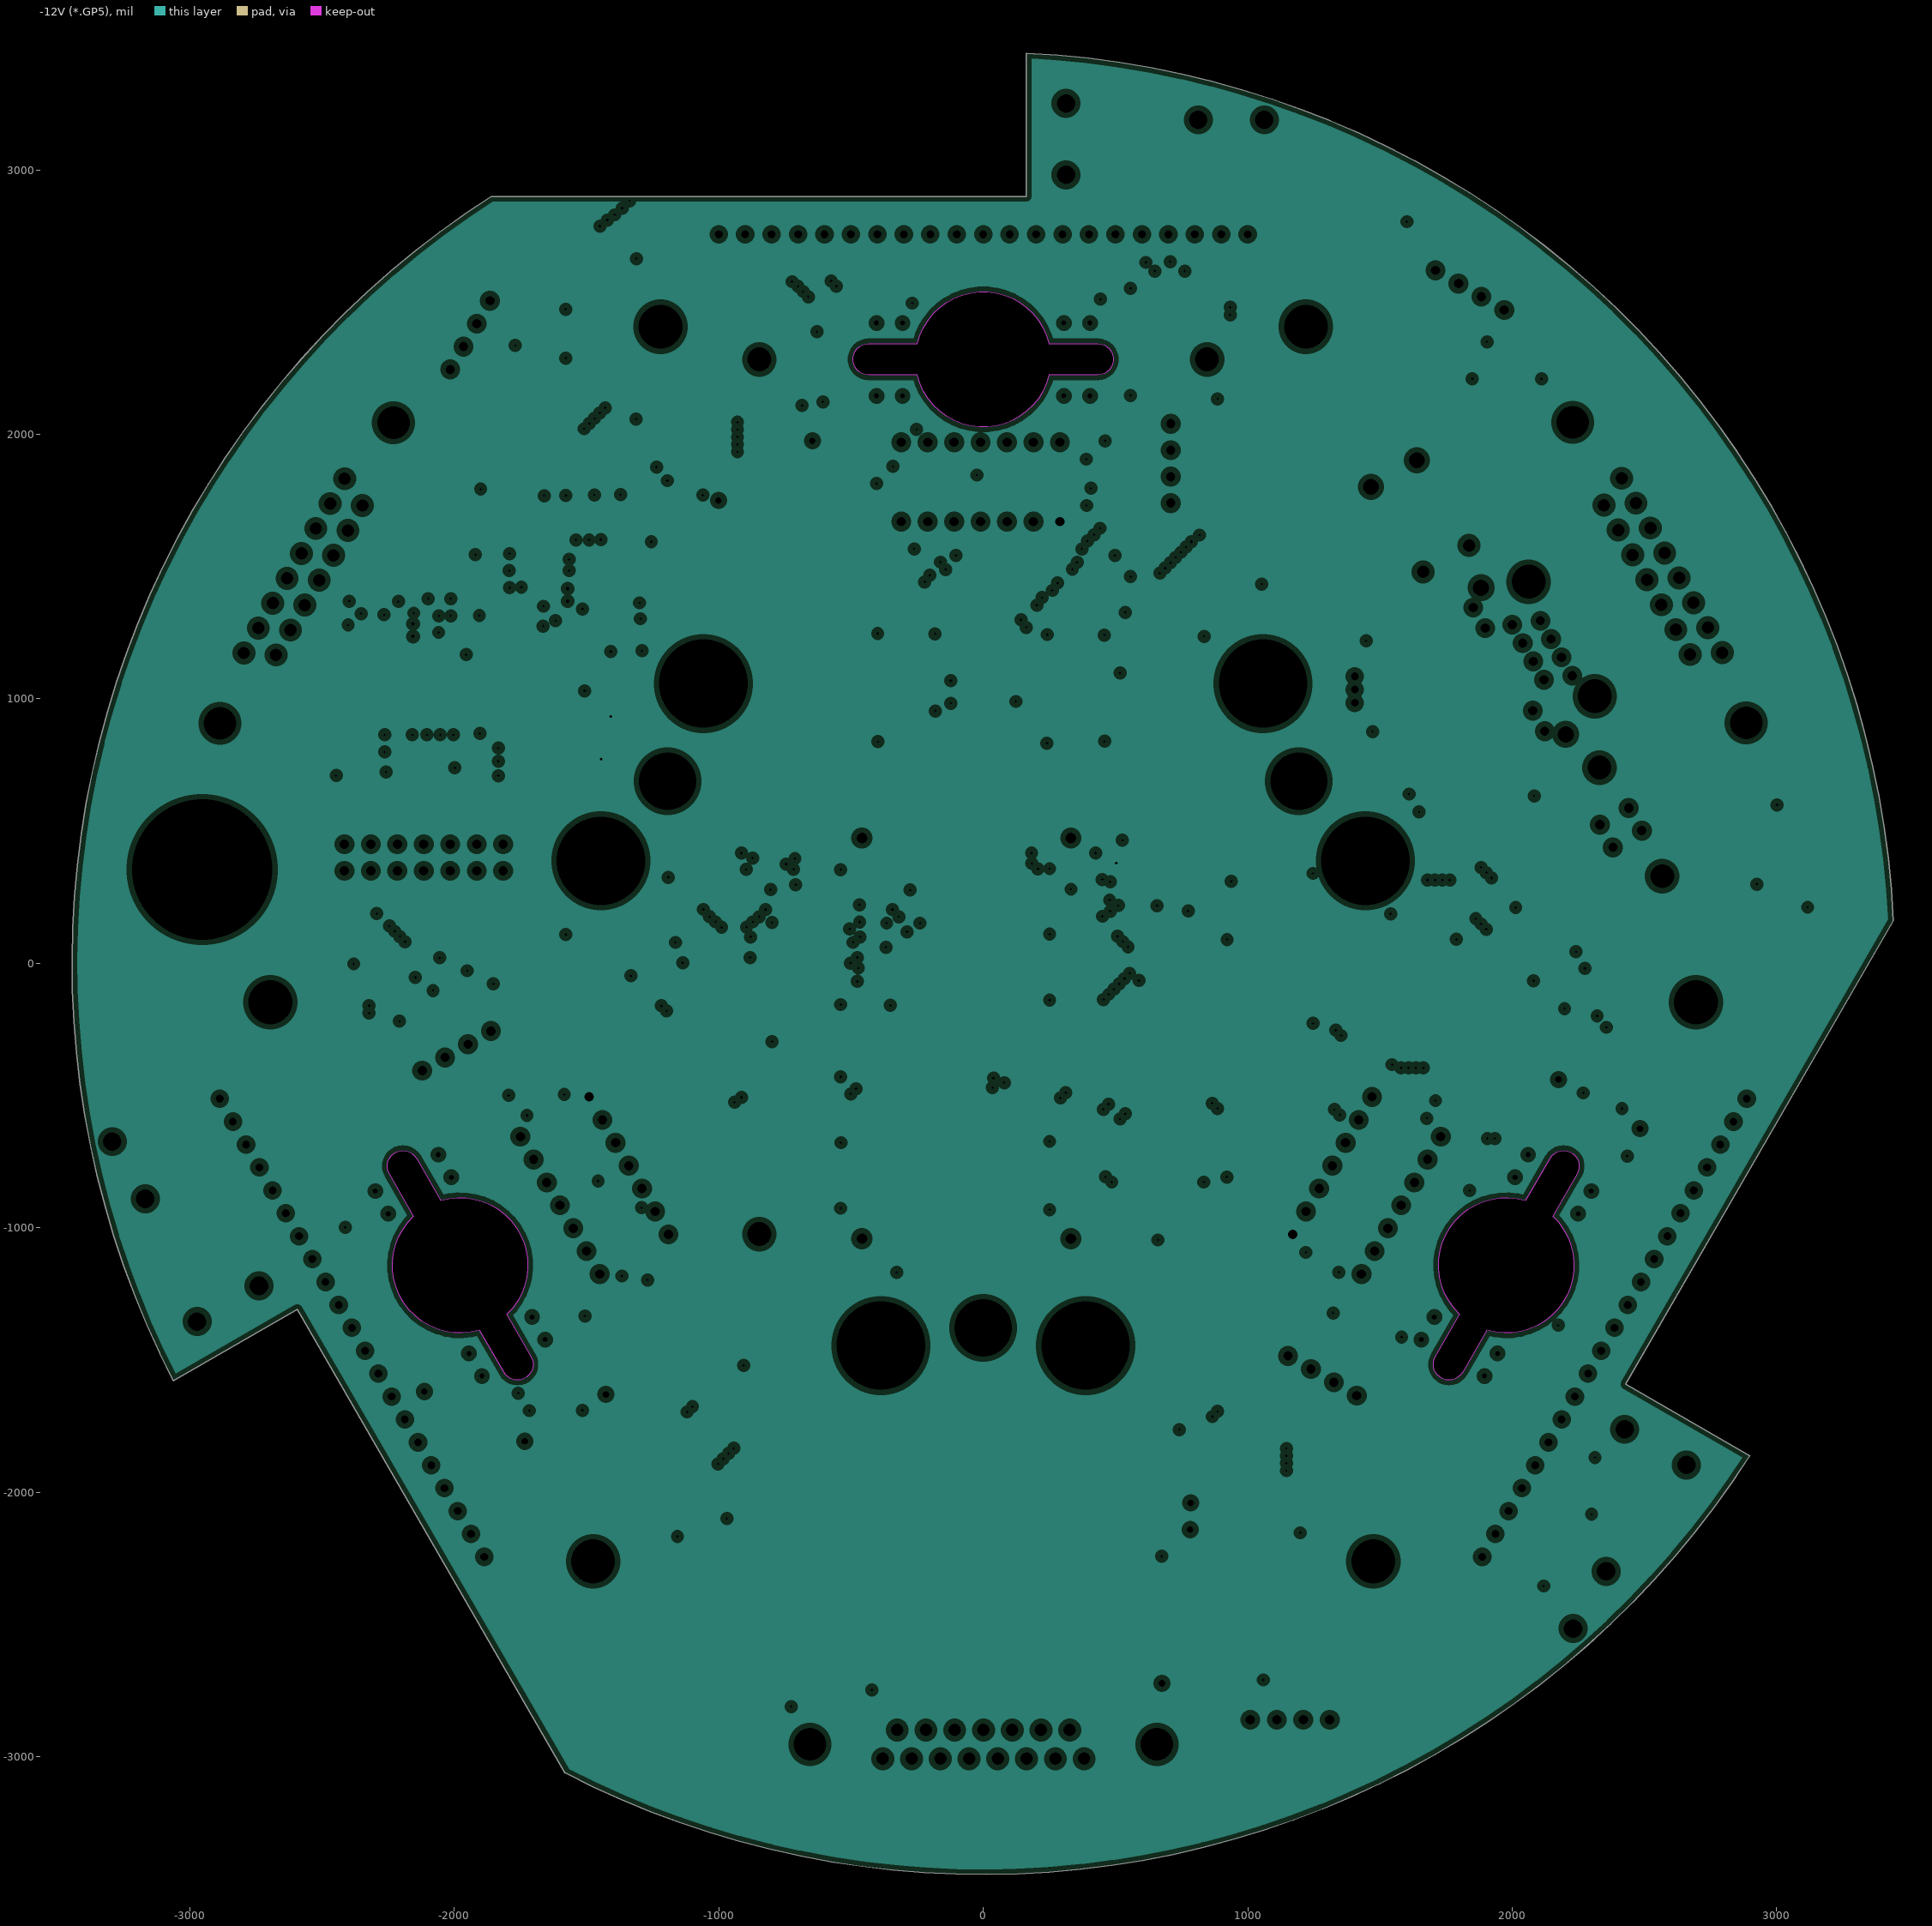
[diagram p7: -12V (*.GP5), clearances drawn from the general rule]
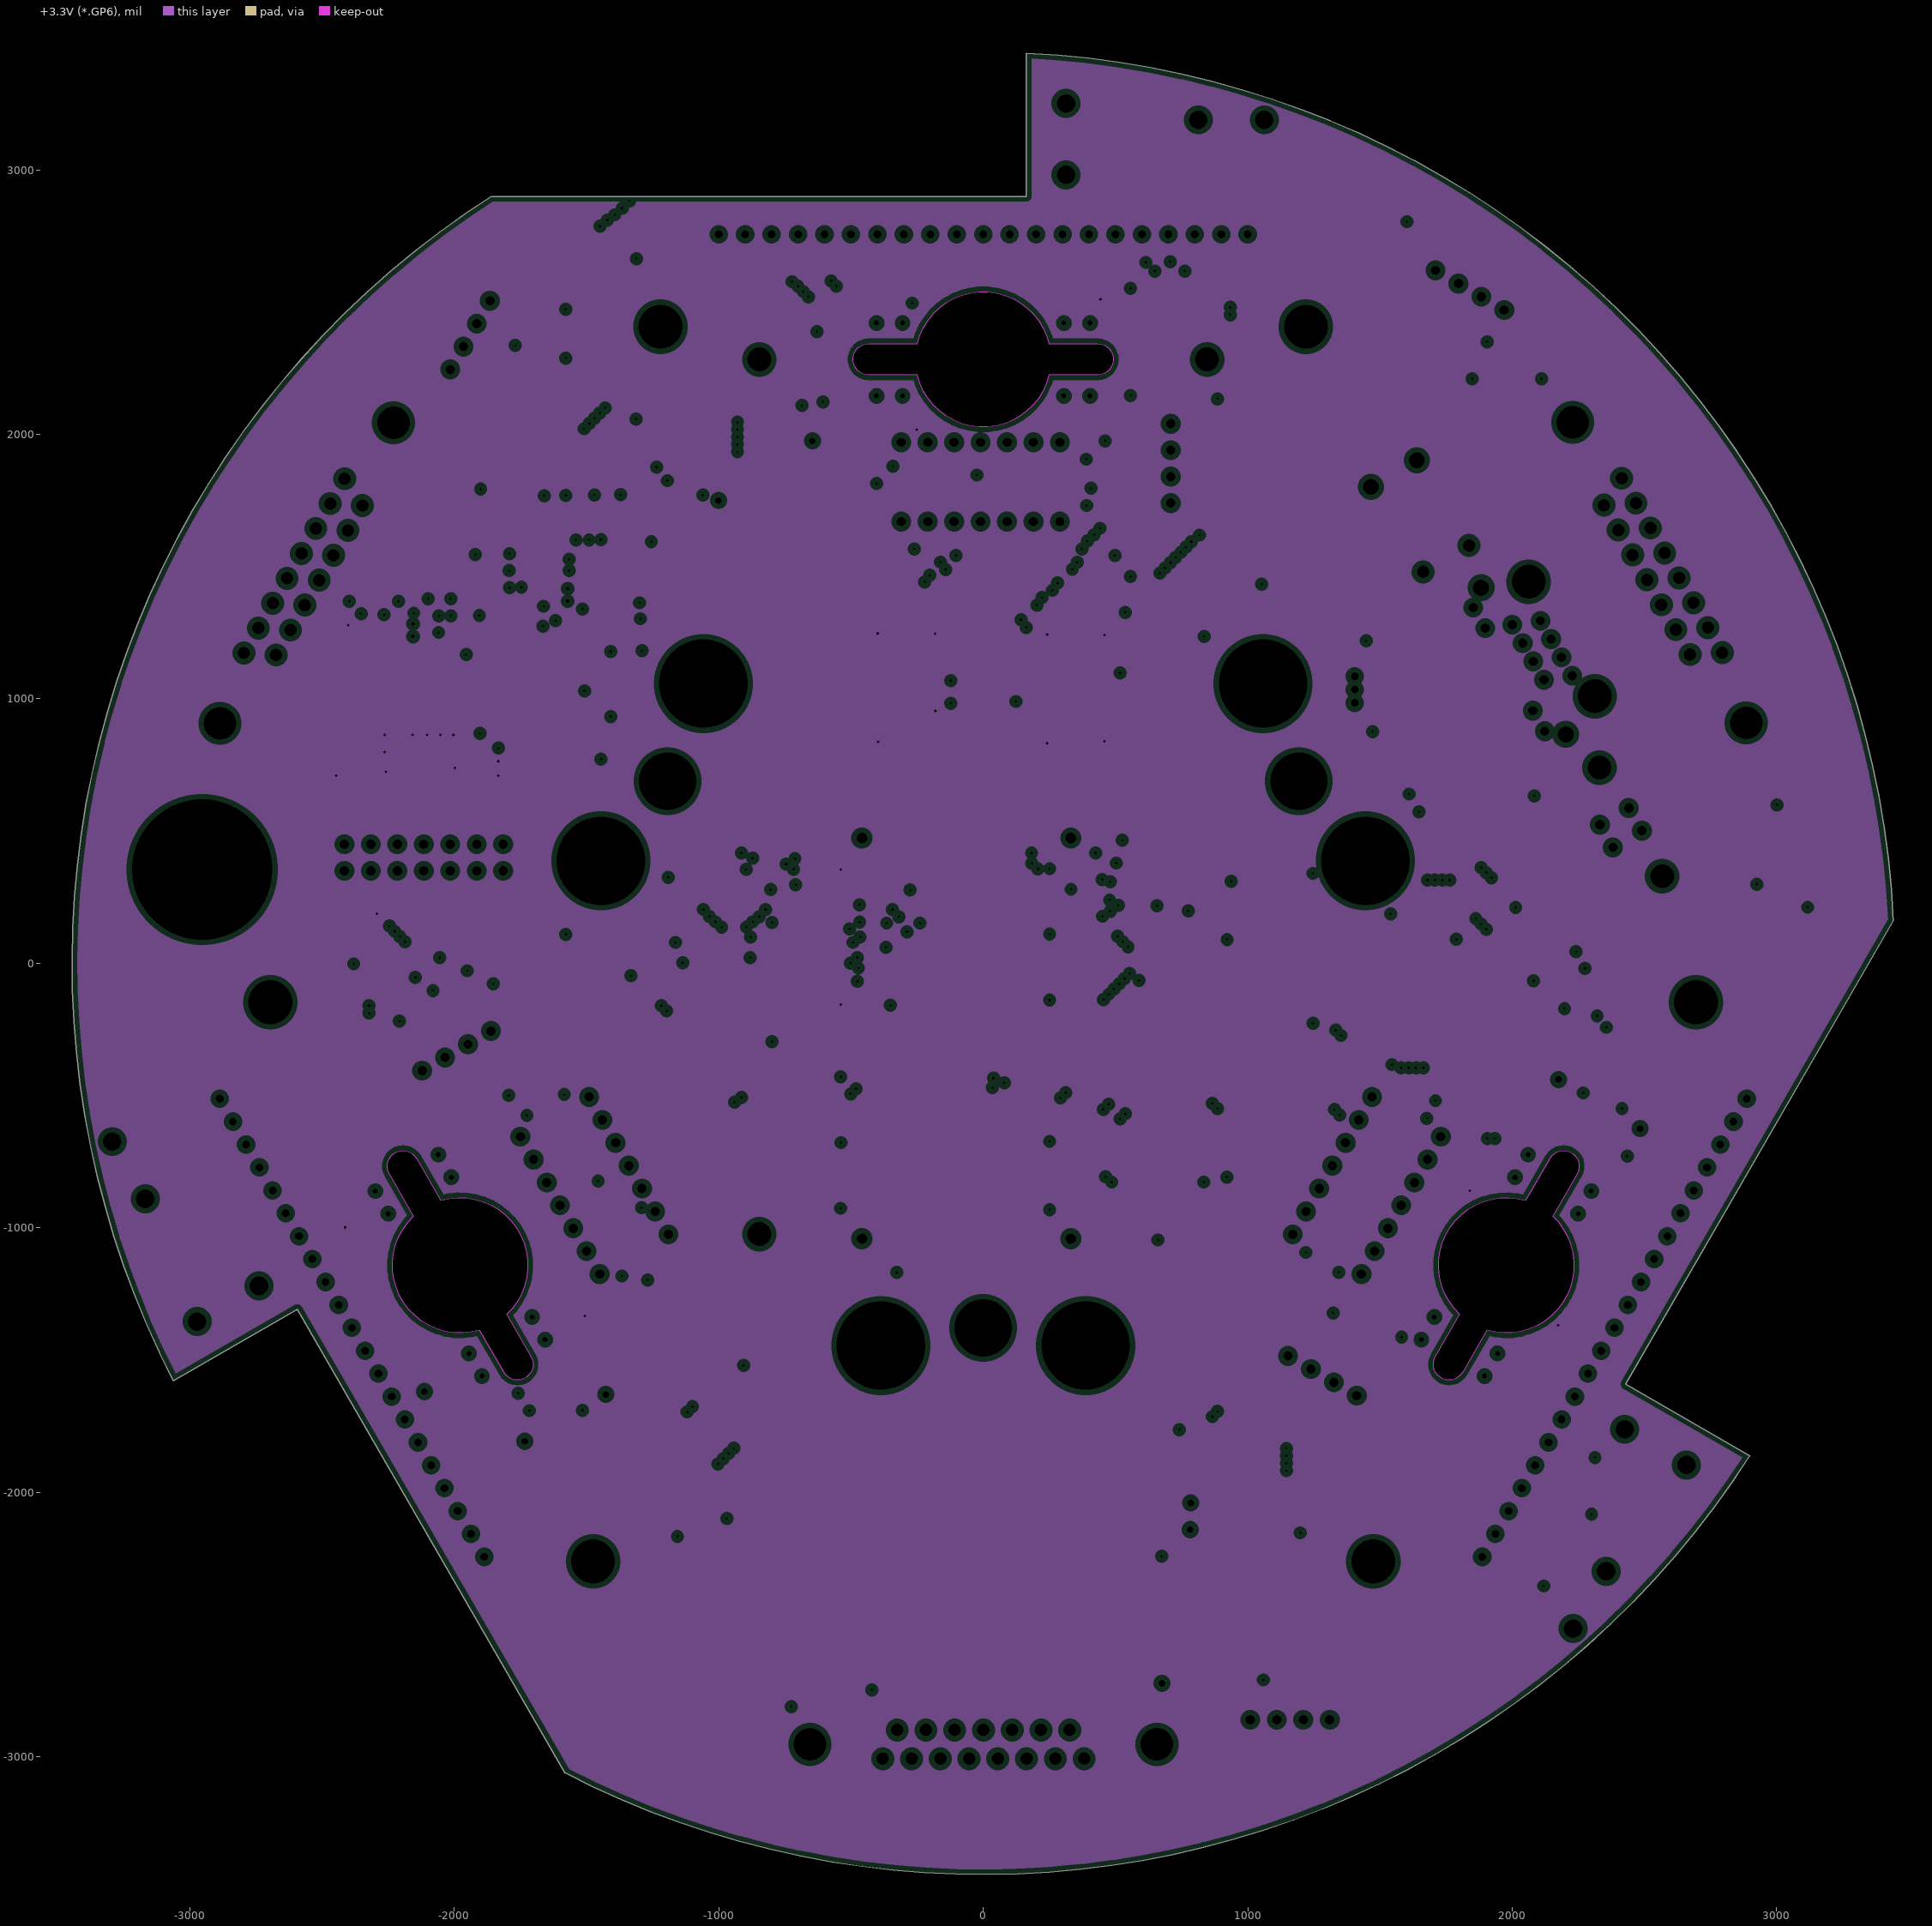
[diagram p8: +3.3V (*.GP6), clearances drawn from the general rule]

## Layer stack, top to bottom
Top Layer (*.GTL): signal copper 1.4
Dielectric: core 5, FR-4, Dk 4.8
Mid-Layer 1 (*.G1): signal copper 1.4
Dielectric: prepreg 5, FR-4, Dk 4.8
+24V (*.GP1): plane copper 1.4, net +24V
Dielectric: core 5, FR-4, Dk 4.8
GND (*.GP2): plane copper 1.4, net GND
Dielectric: prepreg 5, FR-4, Dk 4.8
+5V (*.GP3): plane copper 1.4, net +5V
Dielectric: core 5, FR-4, Dk 4.8
+12V (*.GP4): plane copper 1.4, net +12V
Dielectric: prepreg 5, FR-4, Dk 4.8
-12V (*.GP5): plane copper 1.4, net -12V
Dielectric: core 5, FR-4, Dk 4.8
+3.3V (*.GP6): plane copper 1.4, net +3.3V
Dielectric: prepreg 5, FR-4, Dk 4.8
Bottom Layer (*.GBL): signal copper 1.4

## Board outline
-3061.67,-1579.02 -2592.8,-1308.32 -1581.13,-3060.6 -1475.12,-3113.08 -1367.37,-3161.89 -1258,-3206.97 -1147.16,-3248.27 -1034.96,-3285.74 -921.54,-3319.34 -807.03,-3349.02 -691.58,-3374.76 -575.31,-3396.51 -458.36,-3414.26 -340.86,-3427.99 -222.97,-3437.67 -104.81,-3443.3 13.46,-3444.87 131.73,-3442.38 249.84,-3435.82 367.65,-3425.22 485.03,-3410.58 601.84,-3391.92 717.94,-3369.26 833.19,-3342.62 947.46,-3312.05 1060.61,-3277.56 1172.52,-3239.22 1283.04,-3197.05 1392.04,-3151.12 1499.41,-3101.47 1605.01,-3048.16 1708.71,-2991.26 1810.4,-2930.83 1909.96,-2866.95 2007.26,-2799.69 2102.2,-2729.12 2194.66,-2655.34 2284.53,-2578.43 2371.71,-2498.47 2456.09,-2415.57 2537.58,-2329.82 2616.07,-2241.33 2691.48,-2150.19 2763.71,-2056.52 2832.69,-1960.42 2898.33,-1862.01 2429.46,-1591.31 3441.14,160.97 3433.58,279.02 3421.98,396.74 3406.34,513.99 3386.69,630.63 3363.04,746.54 3335.42,861.56 3303.88,975.56 3268.43,1088.42 3229.14,1199.99 3186.04,1310.15 3139.18,1418.76 3088.61,1525.7 3034.41,1630.84 2976.63,1734.06 2915.34,1835.23 2850.61,1934.24 2782.52,2030.97 2711.15,2125.3 2636.59,2217.13 2558.91,2306.34 2478.22,2392.84 2394.61,2476.51 2308.17,2557.27 2219.01,2635 2127.23,2709.63 2032.95,2781.07 1936.27,2849.23 1837.3,2914.02 1736.17,2975.38 1633,3033.24 1527.89,3087.51 1420.99,3138.15 1312.41,3185.09 1202.28,3228.27 1090.74,3267.64 977.91,3303.16 863.92,3334.79 748.92,3362.48 633.03,3386.21 516.4,3405.95 399.16,3421.67 281.45,3433.35 163.41,3440.99 163.41,2899.59 -1859.95,2899.59 -1958.41,2834.03 -2054.55,2765.12 -2148.28,2692.95 -2239.47,2617.6 -2328.02,2539.17 -2413.82,2457.75 -2496.78,2373.42 -2576.79,2286.3 -2653.77,2196.49 -2727.62,2104.08 -2798.25,2009.19 -2865.58,1911.93 -2929.53,1812.42 -2990.03,1710.77 -3047.01,1607.11 -3100.39,1501.55 -3150.11,1394.22 -3196.12,1285.24 -3238.37,1174.75 -3276.79,1062.87 -3311.35,949.74 -3342,835.5 -3368.72,720.26 -3391.46,604.18 -3410.21,487.38 -3424.93,370.01 -3435.62,252.21 -3442.25,134.1 -3444.82,15.84 -3443.34,-102.44 -3437.79,-220.6 -3428.19,-338.5 -3414.55,-456 -3396.88,-572.96 -3375.21,-689.25 -3349.55,-804.73 -3319.95,-919.25 -3286.43,-1032.69 -3249.04,-1144.92 -3207.82,-1255.79 -3162.81,-1365.19 -3114.08,-1472.97
cut-out: -433.05,2342.51 -248.98,2342.51 -239.45,2373.67 -226.05,2403.37 -208.98,2431.13 -188.52,2456.49 -165,2479.05 -138.81,2498.43 -110.36,2514.33 -80.13,2526.48 -48.59,2534.7 -16.27,2538.84 16.31,2538.84 48.64,2534.7 80.17,2526.48 110.4,2514.33 138.85,2498.43 165.04,2479.04 188.56,2456.49 209.02,2431.13 226.09,2403.37 239.5,2373.67 249.02,2342.51 433.09,2342.51 445.37,2341.22 457.11,2337.4 467.8,2331.23 476.98,2322.97 484.24,2312.98 489.26,2301.7 491.82,2289.62 491.82,2277.28 489.26,2265.2 484.24,2253.93 476.98,2243.94 467.8,2235.68 457.11,2229.5 445.37,2225.69 433.09,2224.4 249.02,2224.4 239.5,2193.23 226.09,2163.53 209.02,2135.78 188.56,2110.42 165.04,2087.86 138.85,2068.48 110.4,2052.58 80.17,2040.42 48.64,2032.21 16.31,2028.07 -16.27,2028.07 -48.59,2032.21 -80.13,2040.42 -110.36,2052.58 -138.81,2068.48 -165,2087.86 -188.52,2110.42 -208.98,2135.78 -226.05,2163.53 -239.45,2193.23 -248.98,2224.4 -433.05,2224.4 -445.33,2225.69 -457.07,2229.5 -467.76,2235.68 -476.94,2243.94 -484.19,2253.93 -489.21,2265.2 -491.78,2277.28 -491.78,2289.63 -489.21,2301.7 -484.19,2312.98 -476.94,2322.97 -467.76,2331.23 -457.07,2337.4 -445.33,2341.22
cut-out: -1801.88,-1327.86 -1709.84,-1487.27 -1704.82,-1498.54 -1702.25,-1510.62 -1702.25,-1522.97 -1704.82,-1535.04 -1709.84,-1546.32 -1717.1,-1556.31 -1726.27,-1564.57 -1736.96,-1570.74 -1748.7,-1574.56 -1760.98,-1575.85 -1773.26,-1574.56 -1785,-1570.74 -1795.69,-1564.57 -1804.87,-1556.31 -1812.13,-1546.32 -1904.16,-1386.91 -1935.91,-1394.24 -1968.34,-1397.49 -2000.91,-1396.58 -2033.1,-1391.54 -2064.4,-1382.45 -2094.28,-1369.46 -2122.27,-1352.78 -2147.91,-1332.67 -2170.8,-1309.47 -2190.54,-1283.55 -2206.83,-1255.33 -2219.41,-1225.26 -2228.06,-1193.85 -2232.65,-1161.59 -2233.11,-1129.01 -2229.41,-1096.63 -2221.64,-1064.98 -2209.91,-1034.58 -2194.4,-1005.92 -2175.39,-979.46 -2153.16,-955.63 -2245.2,-796.22 -2250.22,-784.94 -2252.78,-772.87 -2252.78,-760.52 -2250.22,-748.44 -2245.2,-737.17 -2237.94,-727.18 -2228.76,-718.92 -2218.07,-712.74 -2206.33,-708.93 -2194.05,-707.64 -2181.77,-708.93 -2170.03,-712.74 -2159.34,-718.92 -2150.17,-727.18 -2142.91,-737.17 -2050.87,-896.58 -2019.12,-889.24 -1986.7,-886 -1954.13,-886.91 -1921.93,-891.95 -1890.64,-901.04 -1860.75,-914.03 -1832.76,-930.71 -1807.12,-950.82 -1784.24,-974.02 -1764.49,-999.94 -1748.2,-1028.16 -1735.62,-1058.22 -1726.97,-1089.64 -1722.38,-1121.9 -1721.93,-1154.48 -1725.62,-1186.86 -1733.4,-1218.5 -1745.13,-1248.9 -1760.63,-1277.57 -1779.65,-1304.03
cut-out: 2245.24,-796.22 2153.2,-955.63 2175.43,-979.46 2194.45,-1005.92 2209.95,-1034.58 2221.68,-1064.98 2229.46,-1096.63 2233.15,-1129.01 2232.69,-1161.59 2228.1,-1193.85 2219.45,-1225.27 2206.88,-1255.33 2190.58,-1283.55 2170.84,-1309.47 2147.96,-1332.67 2122.31,-1352.78 2094.32,-1369.46 2064.44,-1382.45 2033.14,-1391.54 2000.95,-1396.58 1968.38,-1397.49 1935.95,-1394.25 1904.2,-1386.91 1812.17,-1546.32 1804.91,-1556.31 1795.74,-1564.57 1785.04,-1570.74 1773.3,-1574.56 1761.02,-1575.85 1748.75,-1574.56 1737,-1570.74 1726.31,-1564.57 1717.14,-1556.31 1709.88,-1546.32 1704.86,-1535.04 1702.29,-1522.97 1702.29,-1510.62 1704.86,-1498.55 1709.88,-1487.27 1801.92,-1327.86 1779.69,-1304.03 1760.67,-1277.57 1745.17,-1248.9 1733.44,-1218.5 1725.66,-1186.86 1721.97,-1154.48 1722.42,-1121.9 1727.01,-1089.64 1735.67,-1058.22 1748.24,-1028.16 1764.53,-999.94 1784.28,-974.02 1807.16,-950.82 1832.81,-930.71 1860.8,-914.03 1890.68,-901.04 1921.97,-891.95 1954.17,-886.91 1986.74,-886 2019.17,-889.24 2050.91,-896.58 2142.95,-737.17 2150.21,-727.18 2159.38,-718.92 2170.07,-712.74 2181.82,-708.93 2194.09,-707.64 2206.37,-708.93 2218.11,-712.74 2228.81,-718.92 2237.98,-727.18 2245.24,-737.17 2250.26,-748.45 2252.83,-760.52 2252.83,-772.87 2250.26,-784.94

## Design rules (kind name [scope] priority, off if disabled: settings)
Clearance [All] p1: gap=4
ComponentClearance [(HasFootprint('SuperFin Footprint'))] p1: gap=-400 collisioncheckmode=3 verticalgap=-400 showdistances=TRUE
HoleSize [All] p1: absolutevalues=TRUE maxlimit=600 minlimit=1 maxpercent=80.000 minpercent=20.000
MinimumSolderMaskSliver [All] p1: minsoldermaskwidth=1
PlaneClearance [All] p1: clearance=20
PlaneConnect [All] p1: planeconnectstyle=Relief reliefexpansion=20 reliefentries=4 reliefconductorwidth=10 reliefairgap=10
PolygonConnect [All] p1: connectstyle=Direct reliefconductorwidth=10 reliefentries=4 polygonreliefangle="90 Angle"
RoomDefinition "780-00012-P4, Sch M2 Focus Drive" [InComponentClass('780-00012-P4, Sch M2 Focus Drive')] p1: confinementstyle=ConfineIn formatcopy=TRUE lockcomponents=FALSE outline -4098.86,-4399.81 5799.02,-4399.81 5799.02,3645 -4098.86,3645
RoomDefinition "780-00012-P3, Sch M2 Focus Drive" [InComponentClass('780-00012-P3, Sch M2 Focus Drive')] p2: confinementstyle=ConfineIn formatcopy=TRUE lockcomponents=FALSE outline -4031.86,-4366.81 5748.02,-4366.81 5748.02,3809 -4031.86,3809
RoomDefinition "780-00012-P2, Sch M2 Focus Drive" [InComponentClass('780-00012-P2, Sch M2 Focus Drive')] p3: confinementstyle=ConfineIn formatcopy=TRUE lockcomponents=FALSE outline -4081.86,-4282.81 5731.02,-4282.81 5731.02,3706 -4081.86,3706
RoomDefinition "780-00012-P1, Sch M2 Focus Drive" [InComponentClass('780-00012-P1, Sch M2 Focus Drive')] p4: confinementstyle=ConfineIn formatcopy=TRUE lockcomponents=FALSE outline -4065.86,-4232.81 5825.02,-4232.81 5825.02,4034 -4065.86,4034
RoutingVias [All] p1: holewidth=10 width=24 viastyle="Through Hole" minholewidth=10 minwidth=24 maxholewidth=25 maxwidth=50
SilkToSilkClearance [All] p1: silktosilkclearance=3
SilkscreenOverComponentPads [All] p1: minsilkscreentomaskgap=1
SolderMaskExpansion [All] p1: expansion=4
Width [All] p1: maxlimit=200 minlimit=5 preferedwidth=5
21 further rules are at their usual default settings.

## Classes and differential pairs
component class "780-00012-P4, Sch M2 Focus Drive": C10 C11 C12 C13 C14 C15 C16 C17 C18 C19 C20 C31 C32 C33 D1 F1 L2 L3 P1 P2 P3 P7 R19 R20 R21 R22 R23 R24 R25 R29 R30 R31 R32 R33 R34 R35 R36 R37 R38 R39 R40 TP16 TP17 TP18 TP19 TP20 TP21 TP22 TP23 TP24 TP25 TP26 TP27 TP28 TP29 U19 U20 U21 U22 U23
component class "780-00012-P3, Sch M2 Focus Drive": J1 J5 J6 L1 R16 R17 R18 U18
component class "780-00012-P2, Sch M2 Focus Drive": C22 C23 C24 C25 C26 C27 C28 C29 C30 J2 J3 J4 R1 R2 R3 R4 R5 R6 R7 R8 R9 R10 R11 R12 R13 R14 R15 R26 R27 R28 TP10 TP11 TP12 TP13 TP14 TP15 U6 U7 U8 U9 U10 U11 U12 U13 U14 U15 U16 U17
component class "780-00012-P1, Sch M2 Focus Drive": C1 C2 C3 C4 C5 C6 C7 C8 C9 J7 J8 J9 P4 P5 P6 S1 S2 S3 TP1 TP2 TP3 TP4 TP5 TP6 TP7 TP8 TP9 U1 U2 U3 U4 U5

## Components (designator, comment, footprint, x,y, rotation, side; value= is the part's Value field where it differs from the comment)
C1 "63V" "CAP 220UF 63V" -819.98,1860 r270 bottom
C2 "63V" "CAP 220UF 63V" -1579.98,-1860 r120 bottom
C3 "63V" "CAP 220UF 63V" 2430.02,-460 r240 bottom
C4 "Cap SMD" SMD_0805 -1149.98,1770 r0 top
C5 "Cap SMD" SMD_0805 -1614.98,-1690 r0 top
C6 "Cap SMD" SMD_0805 2315.02,-550 r180 top
C7 "16V" SMD_CAP_3216 -144.98,2640 r180 top
C8 "16V" SMD_CAP_3216 -2189.98,-1430 r300 top
C9 "16V" SMD_CAP_3216 2335.02,-1175 r60 top
C10 "1u" 2012[0805] 880.02,-2090 r270 top
C11 "Cap SMD" SMD_0805 -2252.98,1104 r90 top
C12 "10V" SMD_CAP_7343 675.02,-2495 r90 top
C13 "16V" SMD_0805 -1902.98,769 r270 top
C14 "Cap SMD" SMD_0805 -2302.98,1367 r180 bottom
C15 "25V" SMD_0805 -2102.98,1359 r0 top
C16 "16V" SMD_CAP_3216 -1289.98,1050 r90 top
C17 "16V" SMD_CAP_3216 -1704.98,1045 r90 top
C18 "Low ESR" SMD_1206 -1685.98,1508 r180 top
C19 "Low ESR" SMD_1206 -1440.98,1508 r0 top
C20 "Cap SMD" SMD_0805 -1390.98,1303 r0 top
C22 "Cap SMD" SMD_0805 1625.02,-670 r240 bottom
C23 "Cap SMD" SMD_0805 -239.98,1880 r0 bottom
C24 "Cap SMD" SMD_0805 1499.02,-590 r60 bottom
C25 "Cap SMD" SMD_0805 1270.02,-1010 r60 bottom
C26 "Cap SMD" SMD_0805 -239.98,1745 r180 bottom
C27 "Cap SMD" SMD_0805 289.02,1732 r180 bottom
C28 "Cap SMD" SMD_0805 -1409.98,-1100 r120 bottom
C29 "Cap SMD" SMD_0805 -1279.98,-1020 r300 bottom
C30 "Cap SMD" SMD_0805 -1534.98,-580 r300 bottom
C31 "Cap SMD" SMD_0805 1570.02,1105 r0 top
C32 "Cap SMD" SMD_0805 -1579.98,2380 r270 top
C33 "Cap SMD" SMD_0805 1905.02,2255 r270 top
D1 "SL43-E3/57T" SMC -2007.98,1089 r0 top
Designator13 "Comment" "TARGET MECHANICAL 5" -3710,3660 r0 top
Designator14 "Comment" "TARGET MECHANICAL 5" 3690,3760 r0 top
Designator15 "Comment" "TARGET MECHANICAL 5" -3695,-3690 r0 top
F1 "RUEF400" "PolySwitch Radial 0.2" 1750.02,1530 r30 top
J1 "61729-0010BLF" "USB Vertical PCB" 2330.02,740 r120 top
J2 "PCC-SMP-V-K" THERMOCOUPLE 2658.95,-1896.56 r240 bottom
J3 "PCC-SMP-V-K" THERMOCOUPLE 313.01,3250.96 r0 bottom
J4 "PCC-SMP-V-K" THERMOCOUPLE -2971.9,-1354.44 r120 bottom
J5 "RJHSE-3381" "RJ45, VERT MOUNT, NO MAGNETICS" 2000.02,1280 r120 top
J6 "15-91-0140" HDR2X7 -2414.98,350 r0 top
J7 "DSUB 15" "DSUB15 PCB VERT Female" 0.89,-2952.77 r0 bottom
J8 "DSUB 15" "DSUB15 PCB VERT Female" -2557.57,1475.61 r240 bottom
J9 "DSUB 15" "DSUB15 PCB VERT Female" 2556.75,1477.12 r120 bottom
L1 "S558-5999-J1-F" "10/100BT Magetics module" 1690.02,840 r0 bottom
L2 "445-3869-1-ND" "Inductor TDC SLF" -2097.98,839 r0 top
L3 "445-3872-2-ND" "Inductor TDC SLF" -1630.98,1738 r180 top
P1 "Header 4" "HDR1X4 for IDC" 1010.02,-2860 r0 top
P2 "Header PWR 2 Pin" "HDR-2 pin w/screw" 1550.02,1850 r210 top
P3 "Header 4" "HDR1X4 for IDC" -1864.98,2505 r240 top
P4 "Header 4" "HDR1X4 for IDC" 709.02,1740 r90 bottom
P5 "Header 4" "HDR1X4 for IDC" -1861.36,-255.99 r210 bottom
P6 "Header 4" "HDR1X4 for IDC" 1152.41,-1484.01 r330 bottom
P7 "Header 4" "HDR1X4 for IDC" 1970.02,2470 r150 top
R1 "Res 0805" SMD_0805 -359.98,2495 r0 top
R2 "Res 0805" SMD_0805 -1849.98,-1625 r0 top
R3 "Res 0805" SMD_0805 2390.02,-785 r0 top
R4 "Res 0805" SMD_0805 -284.98,2065 r0 top
R5 "Res 0805" SMD_0805 -1594.98,-1335 r0 top
R6 "Res 0805" SMD_0805 1885.02,-810 r180 top
R7 "Res 0805" SMD_0805 1395.02,-1085 r60 bottom
R8 "Res 0805" SMD_0805 1330.02,-1045 r240 bottom
R9 "Res 0805" SMD_0805 290.02,1905 r180 bottom
R10 "Res 0805" SMD_0805 290.02,1850 r0 bottom
R11 "Res 0805" SMD_0805 1560.02,-630 r60 bottom
R12 "Res 0805" SMD_0805 -239.98,1815 r180 bottom
R13 "Res 0805" SMD_0805 -1659.98,-655 r300 bottom
R14 "Res 0805" SMD_0805 -1594.98,-615 r120 bottom
R15 "Res 0805" SMD_0805 -1344.98,-1060 r300 bottom
R16 "Res 0805" SMD_0805 1560.02,1220 r0 top
R17 "Res 0805" SMD_0805 1810.02,765 r0 top
R18 "4.7k" 2012[0805] -2254.98,245 r180 top
R19 "Res 0805" SMD_0805 1165.02,-2705 r0 top
R20 "Res3" smd_0805 1525.02,920 r90 top
R21 "Res SMD" SMD_0805 1570.02,1040 r180 top
R22 "Res3" smd_0805 2045.02,2255 r90 top
R23 "Res3" smd_0805 -1719.98,2380 r90 top
R24 "Res SMD" SMD_0805 -1649.98,2380 r90 top
R25 "Res SMD" SMD_0805 1975.02,2255 r90 top
R26 "Res 0805" SMD_0805 350.02,2510 r0 top
R27 "Res 0805" SMD_0805 -2294.98,-1000 r180 top
R28 "Res 0805" SMD_0805 2130.02,-1430 r0 top
R29 "Res 0805" SMD_0805 -2007.98,1209 r90 bottom
R30 "Res 0805" SMD_0805 -1902.98,1274 r180 top
R31 "Res 0805" SMD_0805 -1902.98,1354 r180 top
R32 "Res 0805" SMD_0805 -2312.98,1279 r180 top
R33 "Res 0805" SMD_0805 -2307.98,1369 r0 top
R34 "Res 0805" SMD_0805 -2307.98,1279 r0 bottom
R35 "Res 0805" SMD_0805 -1525.98,1298 r180 bottom
R36 "Res 0805" SMD_0805 -1390.98,1433 r0 top
R37 "Res 0805" SMD_0805 -1455.98,1408 r270 bottom
R38 "Res 0805" SMD_0805 -1345.98,1593 r180 top
R39 "Res 0805" SMD_0805 -1390.98,1368 r180 top
R40 "Res 0805" SMD_0805 -1709.98,1320 r90 top
S1 "B3U-1000P" B3U-1000P -1234.98,1990 r90 top
S2 "B3U-1000P" B3U-1000P -1039.98,-2165 r0 top
S3 "B3U-1000P" B3U-1000P 3045.02,300 r0 top
TP1 "Test Point SMD" "SMD_TEST POINT" 1105.02,3000 r90 top
TP2 "Test Point SMD" "SMD_TEST POINT" -3124.98,-620 r30 top
TP3 "Test Point SMD" "SMD_TEST POINT" 2085.02,-2430 r150 top
TP4 "Test Point SMD" "SMD_TEST POINT" 795.02,2995 r90 top
TP5 "Test Point SMD" "SMD_TEST POINT" -3004.98,-900 r30 top
TP6 "Test Point SMD" "SMD_TEST POINT" 2265.02,-2155 r150 top
TP7 "Test Point SMD" "SMD_TEST POINT" 515.02,3000 r90 top
TP8 "Test Point SMD" "SMD_TEST POINT" -2874.98,-1110 r30 top
TP9 "Test Point SMD" "SMD_TEST POINT" 2395.02,-1920 r150 top
TP10 "Test Point SMD" "SMD_TEST POINT" 1740.02,-470 r330 top
TP11 "Test Point SMD" "SMD_TEST POINT" -464.98,1815 r90 top
TP12 "Test Point SMD" "SMD_TEST POINT" 1210.02,-1255 r150 top
TP13 "Test Point SMD" "SMD_TEST POINT" 465.02,1820 r270 top
TP14 "Test Point SMD" "SMD_TEST POINT" -1234.98,-1250 r30 top
TP15 "Test Point SMD" "SMD_TEST POINT" -1699.98,-440 r30 top
TP16 "Test Point SMD" "SMD_TEST POINT" 1534.02,2804 r90 top
TP17 "Test Point SMD" "SMD_TEST POINT" 745.02,-1860 r90 top
TP18 "Test Point SMD" "SMD_TEST POINT" 1610.02,750 r90 top
TP19 "Test Point SMD" "SMD_TEST POINT" -2209.98,2365 r90 top
TP20 "Test Point SMD" "SMD_TEST POINT" 1730.02,2285 r90 top
TP21 "Test Point SMD" "SMD_TEST POINT" -1404.98,-60 r90 top
TP22 "Test Point SMD" "SMD_TEST POINT" -839.98,-1520 r90 top
TP23 "Test Point SMD" "SMD_TEST POINT" 1125.02,-2155 r90 top
TP24 "Test Point SMD" "SMD_TEST POINT" 3075.02,600 r90 top
TP25 "Test Point SMD" "SMD_TEST POINT" 1134.02,1383 r90 top
TP26 "Test Point SMD" "SMD_TEST POINT" -1969.98,1775 r90 top
TP27 "Test Point SMD" "SMD_TEST POINT" -2444.98,810 r90 top
TP28 "Test Point SMD" "SMD_TEST POINT" -1514.98,770 r90 top
TP29 "Test Point SMD" "SMD_TEST POINT" -1994.98,1545 r90 top
U1 "IM481H Plus" "IM481H VERTICAL" 1000.02,2755.89 r180 top
U2 "IM481H Plus" "IM481H VERTICAL" -2886.66,-511.94 r300 top
U3 "IM481H Plus" "IM481H VERTICAL" 1886.7,-2243.99 r60 top
U4 "SN74AHCT16244DGGR" DGG048_N 350.02,1040 r90 top
U5 "SN74AHCT16244DGGR" DGG048_N -289.98,1040 r90 top
U6 "EE-SX1046" Photo-sensor -305.1,2421.25 r270 bottom
U7 "EE-SX1046" Photo-sensor -1944.29,-1474.88 r30 bottom
U8 "EE-SX1046" Photo-sensor 2249.45,-946.4 r150 bottom
U9 "EE-SX1046" Photo-sensor 305.14,2145.66 r90 bottom
U10 "EE-SX1046" Photo-sensor -2010.74,-808.61 r210 bottom
U11 "EE-SX1046" Photo-sensor 1705.67,-1337.09 r330 bottom
U12 "AD595AQ" Q-14_A 1450.02,-840 r240 top
U13 "AD595AQ" Q-14_A -9.98,1820 r0 top
U14 "LT1007CS8#PBF" S8_M 1450.02,-840 r60 bottom
U15 "LT1007CS8#PBF" S8_M 0.02,1820 r180 bottom
U16 "AD595AQ" Q-14_A -1469.98,-840 r120 top
U17 "LT1007CS8#PBF" S8_M -1464.98,-845 r300 bottom
U18 "SuperFin Module" "SUPERFIN FOOTPRINT" 846.48,-1023.63 r90 top locked
U19 "LM335Z" Z03A 1405.02,1035 r0 top
U20 "PT78ST105S" PSIP_3_SMD -9.98,-2140 r90 top
U21 "LT3682" DD12/DFN12 -2212.98,1304 r0 top
U22 "LTC1144" S8_M -1504.98,1055 r0 top
U23 "LTC3631" DD8/DFN8 -1570.98,1393 r0 top

## Footprints (in the part's own frame and the unit in brackets; to place one, negate y for a bottom-side part, rotate by r counter-clockwise, add the part's x,y. Pads: shape width x height; smd on the part's side, far side on the other; paste and mask are expansions set on the pad)
"10/100BT Magetics module" [mil] "bel p/n S558-6-5999-J1-F"
  rect 25x70 smd: 1(0,0) 2(50,0) 3(100,0) 4(150,0) 5(200,0) 6(250,0) 7(300,0) 8(350,0) 9(350,355) 10(300,355) 11(250,355) 12(200,355) 13(150,355) 14(100,355) 15(50,355) 16(0,355)
  silkscreen extent -50,5 375,300
2012[0805] [mm] "Chip Resistor; Body 2.0 x 1.3 mm (LxW typ)"
  rect 1.3x1.5 smd: 1(-0.95,0) 2(0.95,0)
B3U-1000P [mil] "Pushbutton without ground terminal, without boss"
  rect 40x67 smd: 1(-71,0) 2(71,0)
  silkscreen extent -45,-50 45,50
"CAP 220UF 63V" [mm] "United Chemi-Con size KG5"
  rect 2x6 smd: 1(0,4.475) 2(0,-4.475)
  silkscreen extent -6.5,-6.5 8,8
DD8/DFN8 [mm]
  oval 0.675x0.25 smd: 1(-1.412,0.75) 2(-1.412,0.25) 3(-1.412,-0.25) 4(-1.412,-0.75) 5(1.412,-0.75) 6(1.412,-0.25) 7(1.412,0.25) 8(1.412,0.75)
  rect 1.65x2.38 smd: 9(0,0)
  silkscreen extent -2.42,-1.55 1.55,1.62, body extent -1.55,-1.55 1.55,1.55, height 0.8
DD12/DFN12 [mm] "SON, 12-Leads, Body 3x3 mm, Pitch 0.45mm, IPC High Density"
  oval 0.6x0.25 smd: 1(0,0) 2(0,-0.45) 3(0,-0.9) 4(0,-1.35) 5(0,-1.8) 6(0,-2.25) 7(2.9,-2.25) 8(2.9,-1.8) 9(2.9,-1.35) 10(2.9,-0.9) 11(2.9,-0.45) 12(2.9,0)
  rect 1.65x2.38 smd: 13(1.45,-1.125)
  silkscreen extent -0.97,-2.68 3,0.5, body extent -0.1,-2.68 3,0.42, height 0.8
DGG048_N [mm] "TSSOP, 48-Leads, Body 12.5x6.1mm, Pitch 0.5mm, IPC Medium Density"
  oval 1.75x0.3 smd: 1(-3.625,5.75) 2(-3.625,5.25) 3(-3.625,4.75) 4(-3.625,4.25) 5(-3.625,3.75) 6(-3.625,3.25) 7(-3.625,2.75) 8(-3.625,2.25) 9(-3.625,1.75) 10(-3.625,1.25) 11(-3.625,0.75) 12(-3.625,0.25) 13(-3.625,-0.25) 14(-3.625,-0.75) 15(-3.625,-1.25) 16(-3.625,-1.75) 17(-3.625,-2.25) 18(-3.625,-2.75) 19(-3.625,-3.25) 20(-3.625,-3.75) 21(-3.625,-4.25) 22(-3.625,-4.75) 23(-3.625,-5.25) 24(-3.625,-5.75) 25(3.625,-5.75) 26(3.625,-5.25) 27(3.625,-4.75) 28(3.625,-4.25) 29(3.625,-3.75) 30(3.625,-3.25) 31(3.625,-2.75) 32(3.625,-2.25) 33(3.625,-1.75) 34(3.625,-1.25) 35(3.625,-0.75) 36(3.625,-0.25) 37(3.625,0.25) 38(3.625,0.75) 39(3.625,1.25) 40(3.625,1.75) 41(3.625,2.25) 42(3.625,2.75) 43(3.625,3.25) 44(3.625,3.75) 45(3.625,4.25) 46(3.625,4.75) 47(3.625,5.25) 48(3.625,5.75)
  silkscreen extent -3.75,-6.3 2.35,6.57, body extent -3.1,-6.3 3.1,6.3, height 1.2
"DSUB15 PCB VERT Female" [mil] "NorComp p/n 172-015-212R911"
  rect 70x70 hole 47: 1(380.52,54.36)
  round 70 hole 47: 2(271.8,54.36) 3(163.08,54.36) 4(54.36,54.36) 5(-54.36,54.36) 6(-163.08,54.36) 7(-271.8,54.36) 8(-380.52,54.36) 9(326.16,-54.36) 10(217.44,-54.36) 11(108.72,-54.36) 12(0,-54.36) 13(-108.72,-54.36) 14(-217.44,-54.36) 15(-326.16,-54.36)
  round 175 hole 123: 16(656,0) 17(-656,0)
  silkscreen extent -770,-214 770,215
"HDR1X4 for IDC" [mm] "Connector; Header; 4 Position"
  rect 1.5x1.5 hole 0.9: 1(0,0)
  round 1.5 hole 0.9: 2(2.54,0) 3(5.08,0) 4(7.62,0)
  silkscreen extent -1.4,-2.54 8.89,2.54
HDR2X7 [mm] "Connector; Header; 7x2 Position"
  rect 1.5x1.5 hole 0.9: 1(0,0)
  round 1.5 hole 0.9: 2(0,2.54) 3(2.54,0) 4(2.54,2.54) 5(5.08,0) 6(5.08,2.54) 7(7.62,0) 8(7.62,2.54) 9(10.16,0) 10(10.16,2.54) 11(12.7,0) 12(12.7,2.54) 13(15.24,0) 14(15.24,2.54)
  silkscreen extent -1.27,-1.27 16.51,3.81
"HDR-2 pin w/screw" [mm] "TYCO p/n 796867-2"
  round 2.5 hole 1.5: 1(-2.62,0) 2(2.46,0)
  silkscreen extent -10.16,-6.25 10.16,6.25
"IM481H VERTICAL" [mil] "Stepper motor driver"
  rect 60x60 hole 30: 1(0,0)
  round 60 hole 30: 2(100,0) 3(200,0) 4(300,0) 5(400,0) 6(500,0) 7(600,0) 8(700,0) 9(800,0) 10(900,0) 11(1000,0) 12(1100,0) 13(1200,0) 14(1300,0) 15(1400,0) 16(1500,0) 17(1600,0) 18(1700,0) 19(1800,0) 20(1900,0) 21(2000,0)
  silkscreen extent -350,-138 2350,59
"Inductor TDC SLF" [mm] "SLF series"
  rect 2.2x1.5 smd: 1(0,3.2) 2(0,-3.2)
  silkscreen extent -3.5,-3.5 3.5,3.5
Photo-sensor [mm] "Omron EE-SX1046"
  round 0.8 hole 0.5: A(0,2.5) C(7,0) E(7,2.5) K(0,0)
  silkscreen extent -1.5,-1.25 8.5,5.25
"PolySwitch Radial 0.2" [mm] "PolySwitch footprint"
  round 2 hole 1.2: 1(-2.54,0) 2(2.54,0)
  silkscreen extent -7,-1.5 7,1.5
PSIP_3_SMD [mil] "Plastic Single-In-Line Module, 3 pins"
  rect 150x200 smd: 0(-225,550) 0(225,550)
  rect 40x200 smd: 1(100,-575) 2(0,-575) 3(-100,-575)
  silkscreen extent -450,-470 450,470
Q-14_A [mm] "DIP; 14 Leads; Row Spacing 7.62 mm; Pitch 2.54 mm"
  rect 1.5x1.5 hole 0.9: 1(-7.62,-3.81)
  round 1.5 hole 0.9: 2(-5.08,-3.81) 3(-2.54,-3.81) 4(0,-3.81) 5(2.54,-3.81) 6(5.08,-3.81) 7(7.62,-3.81) 8(7.62,3.81) 9(5.08,3.81) 10(2.54,3.81) 11(0,3.81) 12(-2.54,3.81) 13(-5.08,3.81) 14(-7.62,3.81)
  silkscreen extent -9.85,-2.65 9.85,2.65
"RJ45, VERT MOUNT, NO MAGNETICS" [mil] "Amphenol p/n RJHSE-3381"
  rect 55x55 hole 35: 1(0,0)
  round 55 hole 35: 2(-40,-100) 3(-80,0) 4(-120,-100) 5(-160,0) 6(-200,-100) 7(-240,0) 8(-280,-100) 9(130,95) 10(40,95) 11(-320,95) 12(-410,95)
  round 85 hole 62: 13(180,32) 14(-460,32)
  round 116.14 hole 127.95 unplated: MH1(110,-135) MH2(-390,-135)
  silkscreen extent -460,-235 180,305
S8_M [mm] "SOIC, 8-Leads, Body 4.9x3.9mm, Pitch 1.27mm, IPC Low Density"
  oval 2.5x0.7 smd: 1(-2.45,1.905) 2(-2.45,0.635) 3(-2.45,-0.635) 4(-2.45,-1.905) 5(2.45,-1.905) 6(2.45,-0.635) 7(2.45,0.635) 8(2.45,1.905)
  silkscreen extent -3.81,-2.5 0.8,3.04, body extent -2,-2.5 2,2.5, height 1.76
SMC [mm] "DO-214-AB/SMC; 2 C-Bend Leads; Body 7.9 x 5.9 mm, inc. leads (LxW)"
  rect 2.4x3.3 smd: 1(-3.475,0) 2(3.475,0)
  silkscreen extent -5.07,-2.05 5.43,2.05
SMD_0805 [mil]
  rect 50x50 smd: 1(-45,0) 2(45,0)
  silkscreen extent -1,-1 1,1
smd_0805 [mil]
  rect 50x50 smd: 1(-45,0) 2(45,0)
  silkscreen extent -1,-1 1,1
SMD_1206 [mil]
  rect 63x75 smd: 1(-55,0) 2(55,0)
SMD_CAP_3216 [mil]
  rect 78x48 smd: 1(55,0) 2(-55,0)
  silkscreen extent -108,-65 134,38
SMD_CAP_7343 [mil]
  rect 102x94 smd: NEG(-126,0) POS(126,0)
  silkscreen extent -145,-80 220,80
"SMD_TEST POINT" [mil] "Keystone 5015"
  rect 135x70 smd: 1(0,0)
"SUPERFIN FOOTPRINT" [mm] "SAMTEC QTH-060-01-L-D-A (x2)"
  round 5.08 hole 2.311: 0(0,43) 0(84,0) 0(84,43)
  round 1 hole 1.02 unplated: 0(38.04,13.08) 0(38.04,33.15) 1(-0.44,33.15) 1(-0.44,13.08)
  rect 0.3x1.45 smd paste+0 mask+0.05: A1(36.05,12.03) A2(36.05,18.21) A2(36.05,18.21) A3(35.55,12.03) A4(35.55,18.21) A5(35.05,12.03) A6(35.05,18.21) A7(34.55,12.03) A8(34.55,18.21) A9(34.05,12.03) A10(34.05,18.21) A11(33.55,12.03) A12(33.55,18.21) A13(33.05,12.03) A14(33.05,18.21) A15(32.55,12.03) A16(32.55,18.21) A17(32.05,12.03) A18(32.05,18.21) A19(31.55,12.03) A20(31.55,18.21) A21(31.05,12.03) A22(31.05,18.21) A23(30.55,12.03) A24(30.55,18.21) A25(30.05,12.03) A26(30.05,18.21) A27(29.55,12.03) A28(29.55,18.21) A29(29.05,12.03) A30(29.05,18.21) A31(28.55,12.03) A32(28.55,18.21) A33(28.05,12.03) A34(28.05,18.21) A35(27.55,12.03) A36(27.55,18.21) A37(27.05,12.03) A38(27.05,18.21) A39(26.55,12.03) A40(26.55,18.21) A41(26.05,12.03) A42(26.05,18.21) A43(25.55,12.03) A44(25.55,18.21) A45(25.05,12.03) A46(25.05,18.21) A47(24.55,12.03) A48(24.55,18.21) A49(24.05,12.03) A50(24.05,18.21) A51(23.55,12.03) A52(23.55,18.21) A53(23.05,12.03) A54(23.05,18.21) A55(22.55,12.03) A56(22.55,18.21) A57(22.05,12.03) A58(22.05,18.21) A59(21.55,12.03) A60(21.55,18.21) A61(16.05,12.03) A62(16.05,18.21) A63(15.55,12.03) A64(15.55,18.21) A65(15.05,12.03) A66(15.05,18.21) A67(14.55,12.03) A68(14.55,18.21) A69(14.05,12.03) A70(14.05,18.21) A71(13.55,12.03) A72(13.55,18.21) A73(13.05,12.03) A74(13.05,18.21) A75(12.55,12.03) A76(12.55,18.21) A77(12.05,12.03) A78(12.05,18.21) A79(11.55,12.03) A80(11.55,18.21) A81(11.05,12.03) A82(11.05,18.21) A83(10.55,12.03) A84(10.55,18.21) A85(10.05,12.03) A86(10.05,18.21) A87(9.55,12.03) A88(9.55,18.21) A89(9.05,12.03) A90(9.05,18.21) A91(8.55,12.03) A92(8.55,18.21) A93(8.05,12.03) A94(8.05,18.21) A95(7.55,12.03) A96(7.55,18.21) A97(7.05,12.03) A98(7.05,18.21) A99(6.55,12.03) A100(6.55,18.21) A101(6.05,12.03) A102(6.05,18.21) A103(5.55,12.03) A104(5.55,18.21) A105(5.05,12.03) A106(5.05,18.21) A107(4.55,12.03) A108(4.55,18.21) A109(4.05,12.03) A110(4.05,18.21) A111(3.55,12.03) A112(3.55,18.21) A113(3.05,12.03) A114(3.05,18.21) A115(2.55,12.03) A116(2.55,18.21) A117(2.05,12.03) A118(2.05,18.21) A119(1.55,12.03) A120(1.55,18.21) B1(36.05,32.1) B2(36.05,38.28) B2(36.05,38.28) B3(35.55,32.1) B4(35.55,38.28) B5(35.05,32.1) B6(35.05,38.28) B7(34.55,32.1) B8(34.55,38.28) B9(34.05,32.1) B10(34.05,38.28) B11(33.55,32.1) B12(33.55,38.28) B13(33.05,32.1) B14(33.05,38.28) B15(32.55,32.1) B16(32.55,38.28) B17(32.05,32.1) B18(32.05,38.28) B19(31.55,32.1) B20(31.55,38.28) B21(31.05,32.1) B22(31.05,38.28) B23(30.55,32.1) B24(30.55,38.28) B25(30.05,32.1) B26(30.05,38.28) B27(29.55,32.1) B28(29.55,38.28) B29(29.05,32.1) B30(29.05,38.28) B31(28.55,32.1) B32(28.55,38.28) B33(28.05,32.1) B34(28.05,38.28) B35(27.55,32.1) B36(27.55,38.28) B37(27.05,32.1) B38(27.05,38.28) B39(26.55,32.1) B40(26.55,38.28) B41(26.05,32.1) B42(26.05,38.28) B43(25.55,32.1) B44(25.55,38.28) B45(25.05,32.1) B46(25.05,38.28) B47(24.55,32.1) B48(24.55,38.28) B49(24.05,32.1) B50(24.05,38.28) B51(23.55,32.1) B52(23.55,38.28) B53(23.05,32.1) B54(23.05,38.28) B55(22.55,32.1) B56(22.55,38.28) B57(22.05,32.1) B58(22.05,38.28) B59(21.55,32.1) B60(21.55,38.28) B61(16.05,32.1) B62(16.05,38.28) B63(15.55,32.1) B64(15.55,38.28) B65(15.05,32.1) B66(15.05,38.28) B67(14.55,32.1) B68(14.55,38.28) B69(14.05,32.1) B70(14.05,38.28) B71(13.55,32.1) B72(13.55,38.28) B73(13.05,32.1) B74(13.05,38.28) B75(12.55,32.1) B76(12.55,38.28) B77(12.05,32.1) B78(12.05,38.28) B79(11.55,32.1) B80(11.55,38.28) B81(11.05,32.1) B82(11.05,38.28) B83(10.55,32.1) B84(10.55,38.28) B85(10.05,32.1) B86(10.05,38.28) B87(9.55,32.1) B88(9.55,38.28) B89(9.05,32.1) B90(9.05,38.28) B91(8.55,32.1) B92(8.55,38.28) B93(8.05,32.1) B94(8.05,38.28) B95(7.55,32.1) B96(7.55,38.28) B97(7.05,32.1) B98(7.05,38.28) B99(6.55,32.1) B100(6.55,38.28) B101(6.05,32.1) B102(6.05,38.28) B103(5.55,32.1) B104(5.55,38.28) B105(5.05,32.1) B106(5.05,38.28) B107(4.55,32.1) B108(4.55,38.28) B109(4.05,32.1) B110(4.05,38.28) B111(3.55,32.1) B112(3.55,38.28) B113(3.05,32.1) B114(3.05,38.28) B115(2.55,32.1) B116(2.55,38.28) B117(2.05,32.1) B118(2.05,38.28) B119(1.55,32.1) B120(1.55,38.28)
  rect 2.54x0.64 smd: A121(20.355,15.12) A121(37.245,15.12) A122(0.355,15.12) A122(17.245,15.12) B121(20.355,35.19) B121(37.245,35.19) B122(0.355,35.19) B122(17.245,35.19)
  rect 4.7x0.64 smd: A121(25.625,15.12) A121(31.975,15.12) A122(5.625,15.12) A122(11.975,15.12) B121(25.625,35.19) B121(31.975,35.19) B122(5.625,35.19) B122(11.975,35.19)
  silkscreen extent -3,-3.5 87,46.5
"TARGET MECHANICAL 5" [mil]
THERMOCOUPLE [mil] "Omega, PCB mount, vertical"
  round 120 hole 70: 0(0,270) 0(0,0) 1(500,62) 2(750,62)
  silkscreen extent -1190,-45 830,325
"USB Vertical PCB" [mm] "EDAC USB typeB p/n 690-004-260-023"
  round 2 hole 0.92: 1(-4.77,2.71) 2(-7.27,2.71) 3(-7.27,-0.49) 4(-4.77,-0.49)
  round 4 hole 2.3: 5(-12.04,0) 6(0,0)
  silkscreen extent -12,-4.6 0,6.6
Z03A [mm] "TO, Flat Index; 3 In-Line, Axial Leads; Body Dia. 5mm; Leads 0.55 x 0.50 mm (max)"
  rect 2x1 hole 0.75: 1(0,-1.27)
  oval 2x1 hole 0.75: 2(0,0) 3(0,1.27)
  silkscreen extent -2.6,-3.02 1.61,2.6, body extent -2.61,-2.61 1.6,2.61, height 5.2

## Part data
C1 C2 C3: library part "Cap 220uF, 63V", "CAP 220UF 63V ELECT MVH SMD"
C4 C5 C6 C11 C14 C20 C22 C23 C24 C25 C26 C27 C28 C29 C30 C31 C32 C33: "Capacitor"
C7 C8 C9 C16 C17: library part "Cap Tant 16V", "outline 3.2mm x 1.6mm"
C10: library part Cap, "Capacitor"
C12: library part "Cap Tant 35V", "outline 6.0mm x 3.2mm"
C13 C15 C18 C19: library part "Cap SMD", "Capacitor"
D1: library part Diode, "Default Diode"
F1: library part "Fuse Thermal", "PolySwitch RUE Series"
J1: library part "Header 6", "Header, 6-Pin"
J2 J3 J4: library part "Thermocouple Connector", "T/C Conn PCB mount vertical"
J5: library part "CONN RJ-45 w/o magnetics", "Vertical PC mount, w/o magnetics"
J6: library part "Header 7X2", "Header, 7-Pin, Dual row"
J7 J8 J9: "Receptacle Assembly, 15 Position"
L1: library part "Ethernet Magnetics module", "10/100BT Magnetics Module"
L2 L3: library part "Inductor SMD 10uH 1.8A", "Inductor"
P1 P3 P4 P5 P6 P7: "Header, 4-Pin"
P2: library part "Header 2 PWR", "Header, 2-Pin"
R1 R2 R3 R4 R5 R6 R7 R8 R9 R10 R11 R12 R13 R14 R15 R16 R17 R19 R26 R27 R28 R29 R30 R31 R32 R33 R34 R35 R36 R37 R38 R39 R40: library part "Res SMD", "Resistor 0805"
R18: library part Res3, "Resistor"
R20 R21 R22 R23 R24 R25: "Resistor"
S1 S2 S3: library part SW-PB, "Switch"
TP1 TP2 TP3 TP4 TP5 TP6 TP7 TP8 TP9 TP10 TP11 TP12 TP13 TP14 TP15 TP16 TP17 TP18 TP19 TP20 TP21 TP22 TP23 TP24 TP25 TP26 TP27 TP28 TP29: "SMD loop test point"
U1 U2 U3: "Hybrid stepper motor driver"
U4 U5: "16-Bit Buffer/Driver with 3-State Outputs"
U6 U7 U8 U9 U10 U11: library part Photo-sensor, "Omron EE-SX1046"
U12 U13 U16: "Monolithic Thermocouple Amplifier with Cold Junction Compensation"
U14 U15 U17: "Low Noise BJT input opamp"
U19: "Precision Temperature Sensor"
U20: library part "Volt Reg", "Voltage Regulator"
U21: "1A uPwr Step-Down switching regulator"
U22: "IC VOLT CONV SW-CAP W/SHTDN8SOIC"
U23: "IC CONV STP-DWN ADJ 8-DFN"

## Free pads (board coordinates)
  round 531.25 hole 531.25 unplated: 1(-2952.74,354.32)
  round 236.22 hole 166.14: 1(-2694.98,-147) 1(-1474.98,-2261) 1(-1219.98,2407) 1(1220.02,2407) 1(1475.02,-2261) 1(2695.02,-147)
  round 334.65 hole 334.65 unplated: 1(-1445.06,387.2) 1(-1057.86,1057.86) 1(-387.19,-1445.1) 1(387.23,-1445.1) 1(1057.9,1057.86) 1(1445.11,387.2)
  round 413.39 hole 216.54: 1(-1193.32,688.96) 1(0.02,-1377.97) 1(1193.36,688.96)

## Via types
v1: diameter 24, hole 10, Top Layer (*.GTL) to Bottom Layer (*.GBL), 354 vias
v2: diameter 50, hole 25, Top Layer (*.GTL) to Bottom Layer (*.GBL), 10 vias
v3: diameter 25.98, hole 12.99, Top Layer (*.GTL) to Bottom Layer (*.GBL), tented top, 4 vias

## Nets (pads, with @x,y where several pads share a name; then routed paths per layer and width w, separated by ;. In a path a pad name is that pad's centre, name@x,y a point inside that pad or via, vN(x,y) a via of type N, cw(c..) or ccw(c..) an arc to the next point about the centre after c; other vN are vias at no path point)
1A+: J7.1 U4.32 | length 5908.2
  Top Layer (*.GTL) w5: J7.1@381.41,-3007.13 381.41,-2771 339.78,-2771 330.78,-2762 195.34,-2762 136.61,-2703.27 136.61,-2698 350.02,-2484.59 350.02,-1942 734.02,-1558 734.02,1463.92 785.52,1515.42 785.52,1592.49 v1(786.82,1593.79) ; U4.32@438.6,1182.71 438.6,1645.58 v1@439.02,1646
  Bottom Layer (*.GBL) w5: v1@439.02,1646 728.95,1646 781.16,1593.79 v1(786.82,1593.79)
  other v1: 442.02,1645
1A-: J7.9 U4.33 | length 5703.6
  Top Layer (*.GTL) w5: J7.9@327.05,-2898.41 327.05,-2771 191.61,-2771 127.61,-2707 127.61,-2694.27 341.02,-2480.86 341.02,-1938.27 725.02,-1554.27 725.02,1467.65 765.72,1508.35 765.72,1572.69 v1(767.02,1573.99) ; U4.33@418.92,1182.71 418.92,1619.89 v1(419.02,1620)
  Bottom Layer (*.GBL) w5: v1(419.02,1620) 718.18,1620 764.19,1573.99 v1(767.02,1573.99)
1B+: J7.3 U4.35 | length 5628.6
  Top Layer (*.GTL) w5: J7.3@163.97,-3007.13 163.97,-2771 118.61,-2725.64 118.61,-2690.55 332.02,-2477.13 332.02,-1934.55 716.02,-1550.55 716.02,1471.38 745.92,1501.28 745.92,1552.89 v1(747.22,1554.19) ; U4.35@379.55,1182.71 379.55,1225.52 392.02,1238 v1@392.02,1594
  Bottom Layer (*.GBL) w5: v1@392.02,1594 707.41,1594 v1(747.22,1554.19)
  other v1: 394.02,1597
1B-: J7.11 U4.36 | length 5448.2
  Top Layer (*.GTL) w5: J7.11@109.61,-2898.41 109.61,-2686.82 323.02,-2473.41 323.02,-1930.82 707.02,-1546.82 707.02,1475.11 726.12,1494.2 726.12,1533.1 v1(727.42,1534.39) ; U4.36@359.86,1182.71 364.52,1187.37 364.52,1499.33 373.52,1508.33 373.52,1567.5 v1@373.02,1568
  Bottom Layer (*.GBL) w5: v1@373.02,1568 685.33,1568 718.93,1534.39 v1(727.42,1534.39)
  other v1: 373.02,1567
1I+: J7.14 U4.37 | length 5591.1
  Top Layer (*.GTL) w5: J7.14@-216.55,-2898.41 -216.55,-2771 -120.56,-2771 -111.56,-2762 32.88,-2762 91.61,-2703.27 91.61,-2679.36 305.02,-2465.95 305.02,-1923.36 689.02,-1539.36 689.02,1493.6 v1(687.82,1494.8) ; U4.37@340.18,1182.71 340.18,1466.99 355.52,1482.33 355.52,1515.5 v1(355.02,1516)
  Bottom Layer (*.GBL) w5: v1(355.02,1516) 663.79,1516 684.99,1494.8 v1(687.82,1494.8)
1I-: J7.7 U4.38 | length 5698.5
  Top Layer (*.GTL) w5: J7.7@-270.91,-3007.13 -270.91,-2771 -229.28,-2771 -211.28,-2753 29.15,-2753 82.61,-2699.55 82.61,-2675.64 296.02,-2462.22 296.02,-1919.64 680.02,-1535.64 680.02,1463 v1(668.02,1475) ; U4.38@320.49,1182.71 320.49,1473.47 v1(337.02,1490)
  Bottom Layer (*.GBL) w5: v1@336.05,1490 653.02,1490 v1(668.02,1475)
2A+: J9.1 U4.40 | length 2839.6
  Top Layer (*.GTL) w5: v1(281.02,1438) 281.12,1437.9 U4.40@281.12,1182.71
  Bottom Layer (*.GBL) w5: v1(281.02,1438) 843.35,1438 870.02,1411.32 870.02,1393 1273.68,1393 1280.02,1386.65 1280.02,1381 1346.65,1381 1820.65,1855 2134.39,1855 2203.02,1786.36 2203.02,1710.53 2250.02,1663.53 2259.02,1663.53 2305.09,1709.6 2305.09,1749.59 2329.4,1773.9 2353.63,1773.9 J9.1@2413.57,1833.84
2A-: J9.9 U4.41 | length 2692
  Top Layer (*.GTL) w5: v1(261.02,1410) 261.44,1409.58 U4.41@261.44,1182.71
  Bottom Layer (*.GBL) w5: v1(261.02,1410) 858.62,1410 861.02,1407.6 861.02,1389.27 870.02,1380.27 870.02,1380 1268.29,1380 1276.29,1372 1350.38,1372 1824.38,1846 2130.66,1846 2194.02,1782.64 2194.02,1706.8 2246.29,1654.53 2268.72,1654.53 J9.9@2346.59,1732.4
2B+: J9.3 U4.43 | length 2858.3
  Top Layer (*.GTL) w5: v1(222.02,1383) v1(222.02,1383) U4.43@222.07,1182.71
  Bottom Layer (*.GBL) w5: v1@222.02,1382 v1@223.02,1382 ; v1(222.02,1383) v1@223.02,1382 ; J9.3@2522.29,1645.53 2452.36,1645.53 2418.14,1679.75 2383.76,1679.75 2349.54,1645.53 2242.57,1645.53 2185.02,1703.07 2185.02,1778.91 2126.93,1837 1828.11,1837 1354.11,1363 1272.57,1363 1268.57,1367 870.02,1367 855.02,1382 243.02,1382 v1@223.02,1382
2B-: J9.11 U4.44 | length 2829.8
  Top Layer (*.GTL) w5: U4.44@202.38,1182.71 202.38,1353.36 v1(203.02,1354)
  Bottom Layer (*.GBL) w5: v1(203.02,1354) 1357.84,1354 1831.84,1828 2123.2,1828 2176.02,1775.18 2176.02,1618.09 2250.02,1544.09 J9.11@2455.31,1544.09
2I+: J9.14 U4.46 | length 3239.8
  Top Layer (*.GTL) w5: U4.46@163.01,1182.71 v1(163.02,1270)
  Bottom Layer (*.GBL) w5: v1(163.02,1270) 843.35,1270 870.02,1296.67 870.02,1315 1273.68,1315 1280.02,1321.34 1280.02,1327 1369.02,1327 1843.02,1801 2112.02,1801 2149.02,1764 2149.02,1357.18 2246.29,1259.91 2616.67,1259.91 J9.14@2618.39,1261.63
2I-: J9.7 U4.47 | length 3427.3
  Top Layer (*.GTL) w5: v1(143.02,1299) 143.33,1298.69 U4.47@143.33,1182.71
  Bottom Layer (*.GBL) w5: v1(143.02,1299) 144.02,1298 858.62,1298 861.02,1300.4 861.02,1318.73 870.02,1327.73 870.02,1328 1268.29,1328 1276.29,1336 1365.29,1336 1839.29,1810 2115.75,1810 2158.02,1767.73 2158.02,1360.91 2250.02,1268.91 2566.98,1268.91 2601.2,1303.13 2635.58,1303.13 2669.8,1268.91 J9.7@2739.73,1268.91
3A+: J8.1 U5.27 | length 4080.1
  Top Layer (*.GTL) w5: U5.27@-102.97,1182.71 v1(-102.98,1542)
  Mid-Layer 1 (*.G1) w5: J8.1@-2794.91,1173.25 -2794.91,1311.53 -2692.23,1414.22 -2614.64,1414.22 -2590.33,1438.53 -2590.33,1478.32 -2524.64,1544.02 -2524.64,1583.81 -2470.28,1638.17 -2470.28,1666.73 -2364.61,1772.4 -2330.23,1772.4 -2305.92,1748.09 -2305.92,1713.71 -2253.98,1765.65 -2253.98,1867.64 -1913.62,2208 -999.34,2208 -561.98,1770.64 -561.98,1682.64 -421.33,1542 v1(-102.98,1542)
3A-: J8.9 U5.29 | length 3863.6
  Top Layer (*.GTL) w5: U5.29@-142.34,1182.71 -142.34,1491.63 v1@-141.98,1492
  Mid-Layer 1 (*.G1) w5: J8.9@-2673.58,1165.97 -2673.58,1315.49 -2572.33,1416.73 -2572.33,1458.02 -2506.64,1523.71 -2506.64,1576.35 -2452.28,1630.71 -2452.28,1657.66 -2422.69,1687.24 -2380.86,1687.24 -2365.01,1671.4 -2322.77,1671.4 -2235.98,1758.19 -2235.98,1860.18 -1906.16,2190 -1006.8,2190 -579.98,1763.18 -579.98,1629.93 -442.04,1492 v1@-141.98,1492
  other v1: -141.98,1489
3B+: J8.3 U5.30 | length 3688
  Top Layer (*.GTL) w5: U5.30@-162.03,1182.71 -162.03,1516.95 v1(-161.98,1517)
  Mid-Layer 1 (*.G1) w5: J8.3@-2686.19,1361.56 -2642.54,1405.22 -2610.91,1405.22 -2581.33,1434.8 -2581.33,1461.75 -2515.64,1527.44 -2515.64,1580.08 -2461.28,1634.44 -2461.28,1661.39 -2426.42,1696.24 -2377.13,1696.24 -2361.29,1680.4 -2326.5,1680.4 -2244.98,1761.92 -2244.98,1863.91 -1909.89,2199 -1003.07,2199 -570.98,1766.91 -570.98,1656.29 -431.69,1517 v1(-161.98,1517)
3B-: J8.11 U5.32 | length 3554.1
  Top Layer (*.GTL) w5: v1(-201.98,1467) -201.4,1466.41 U5.32@-201.4,1182.71
  Mid-Layer 1 (*.G1) w5: J8.11@-2564.86,1354.28 -2552,1367.14 -2552,1465.62 -2497.64,1519.98 -2497.64,1559.78 -2443.28,1614.14 -2443.28,1653.93 -2418.97,1678.24 -2384.59,1678.24 -2368.74,1662.4 -2319.04,1662.4 -2226.98,1754.46 -2226.98,1856.45 -1902.43,2181 -1010.52,2181 -588.98,1759.45 -588.98,1603.58 -452.4,1467 v1(-201.98,1467)
3I+: J8.14 U5.33 | length 3128.5
  Top Layer (*.GTL) w5: U5.33@-221.08,1182.71 -221.08,1441.89 v1(-220.98,1442)
  Mid-Layer 1 (*.G1) w5: J8.14@-2401.78,1636.74 -2385.12,1653.4 -2315.32,1653.4 -2217.98,1750.73 -2217.98,1852.73 -1898.71,2172 -1014.25,2172 -597.98,1755.73 -597.98,1577.22 -462.76,1442 v1(-220.98,1442)